# Altium PCB PCB_Nowy.PcbDoc (part 1 of 2)
Units mil, origin at the board's own origin, x right, y up, seen from the top; angles counter-clockwise.
Board outline 6000 x 4000 mil, 6 copper layers (Top Layer, Layer 1, Zasilanie, GND, Layer 2, Bottom Layer), stack 32.112 mil thick; 107 components, 109 nets, 435 pads, 101 vias.
Unrouted connection lines stored in the file: 59.
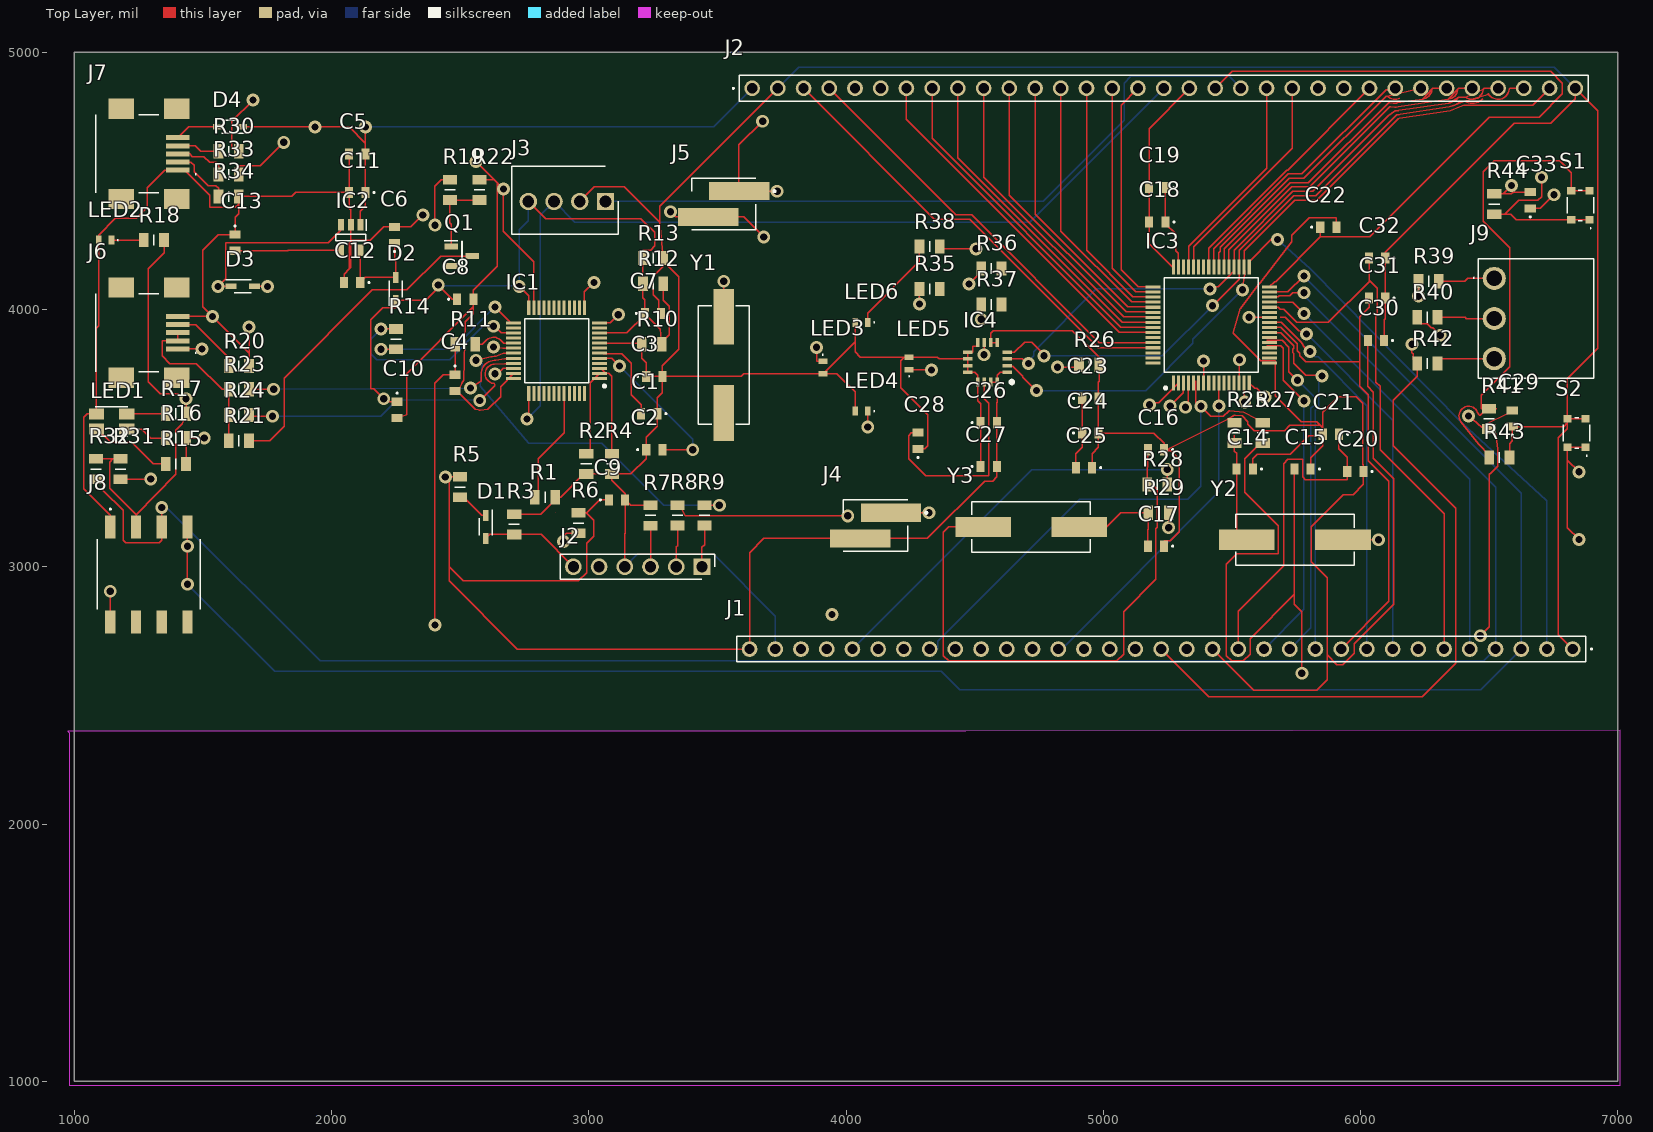
[diagram p0: Top Layer view]
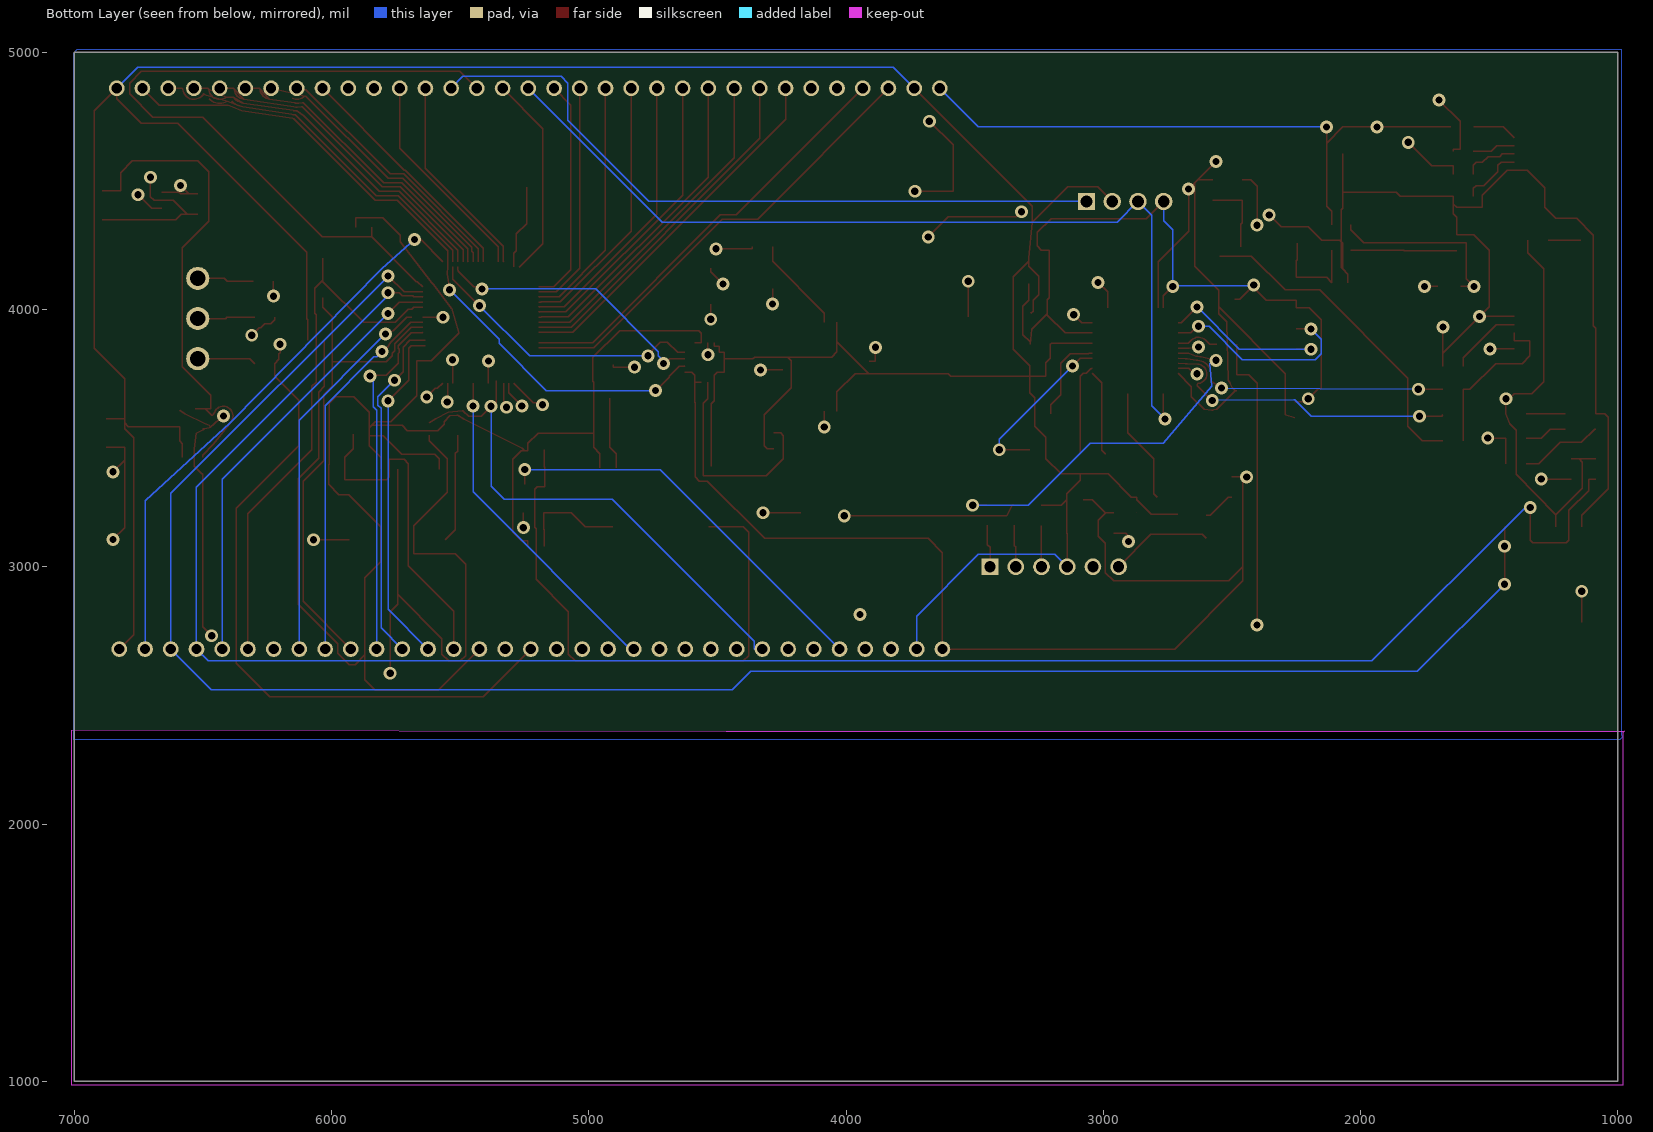
[diagram p1: Bottom Layer view, seen from below]
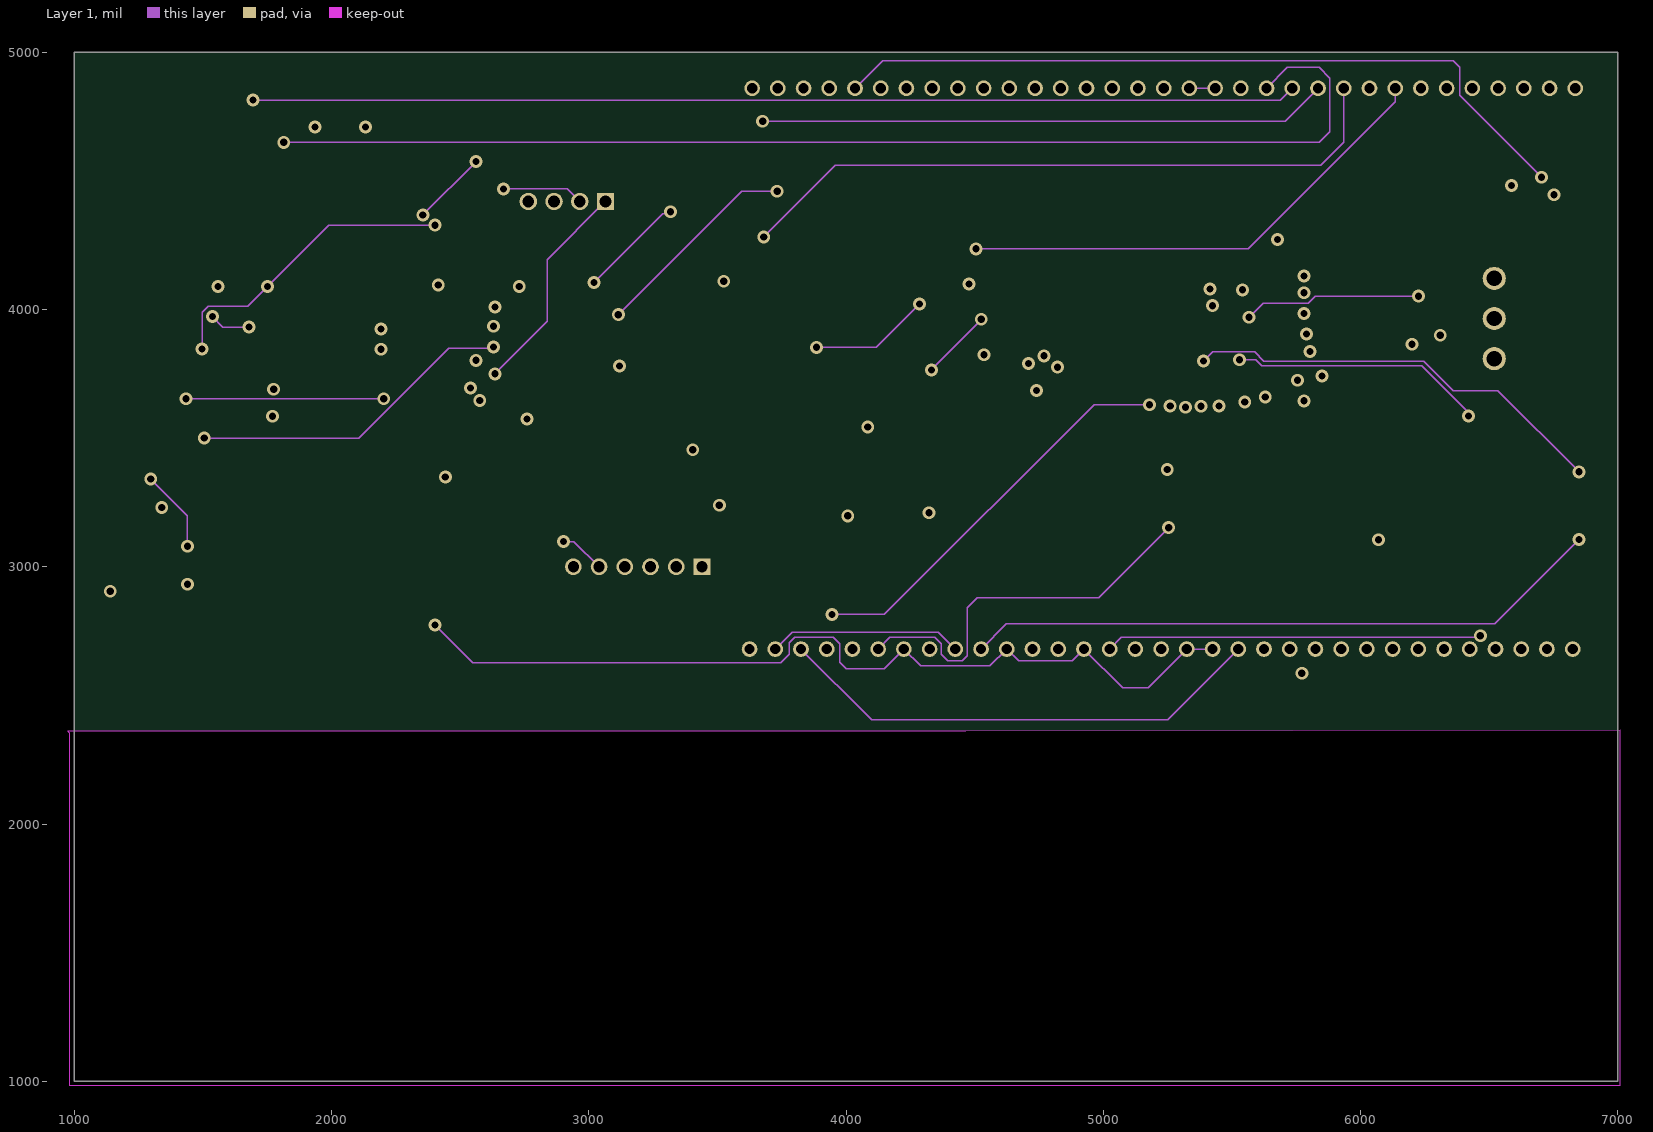
[diagram p2: Layer 1]
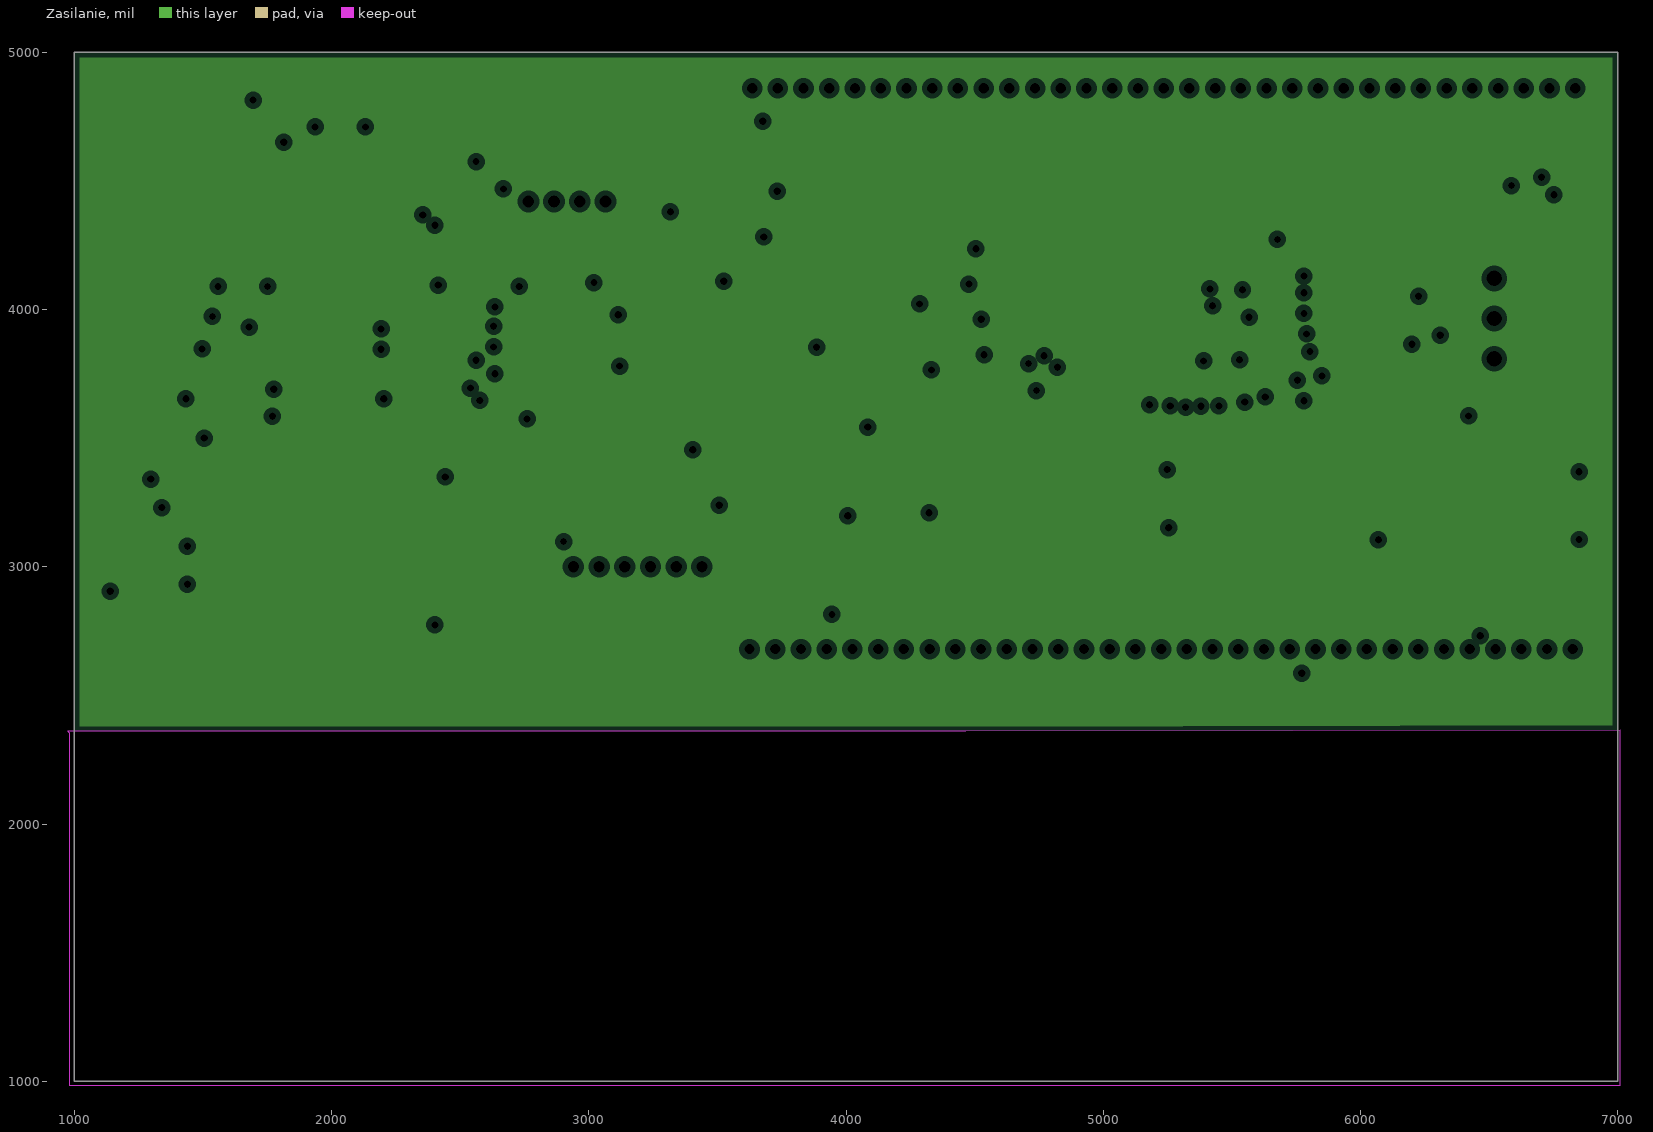
[diagram p3: Zasilanie, clearances drawn from the general rule]
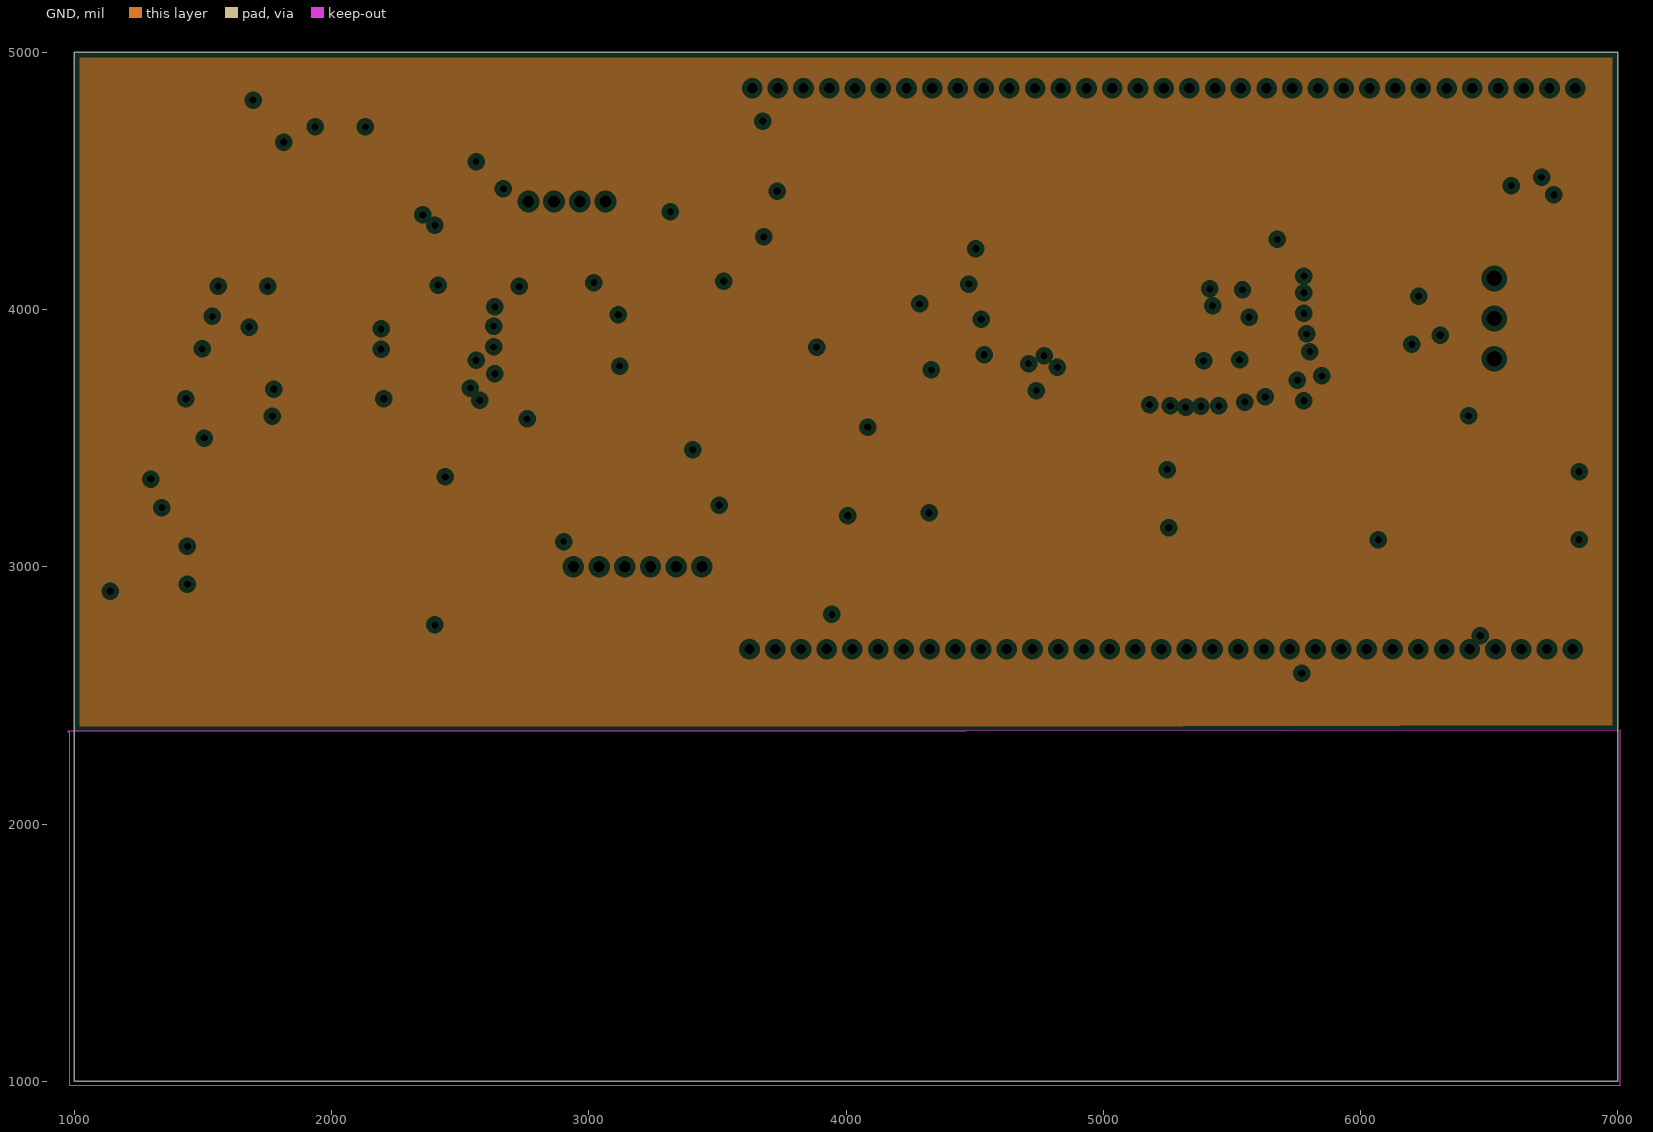
[diagram p4: GND, clearances drawn from the general rule]
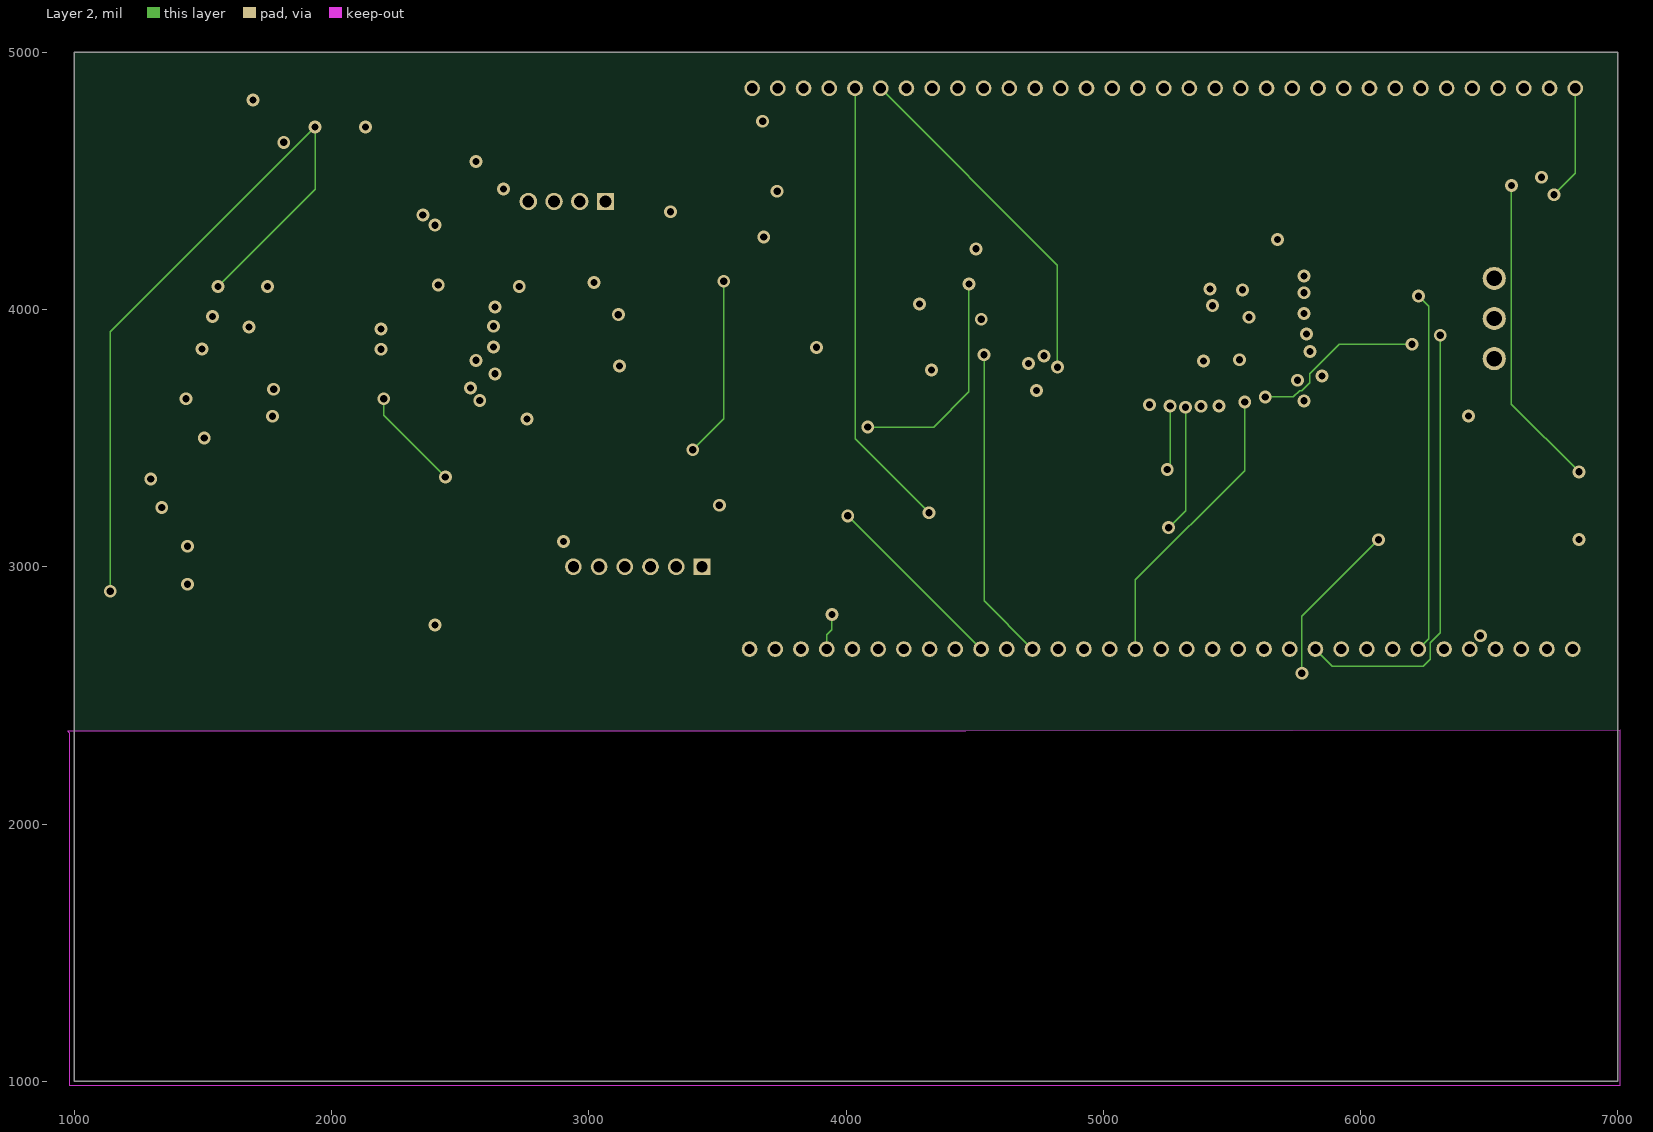
[diagram p5: Layer 2]
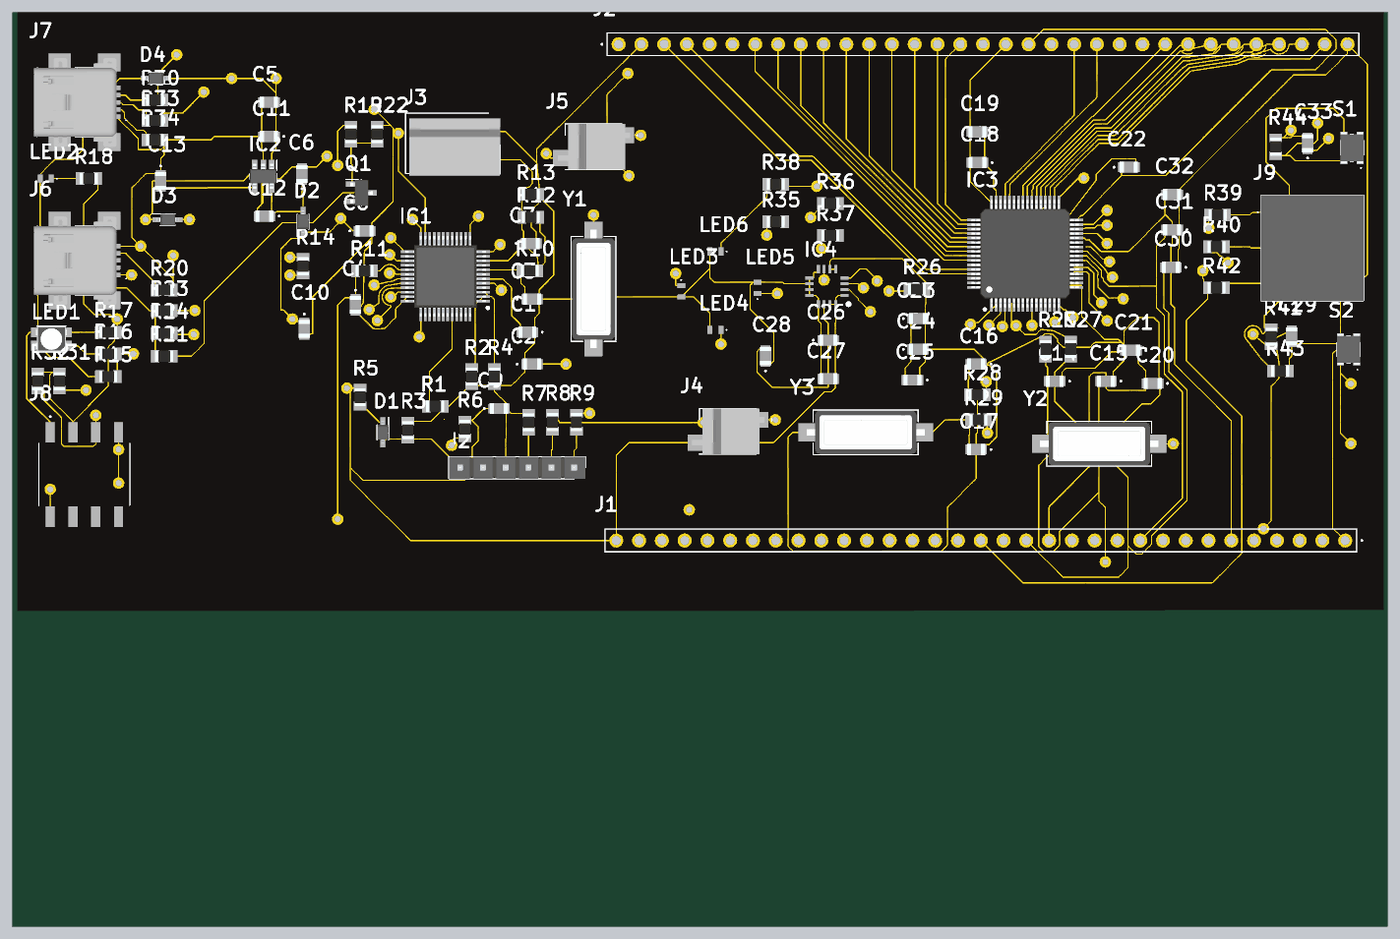
[diagram p6: 3D render of the assembled board from above, using the file's embedded part models]

## Layer stack, top to bottom
Top Solder: solder mask 0.4, Solder Resist, Dk 3.5
Top Layer: signal copper 1.4
Dielectric 4: prepreg 2.8, PP-006, Dk 4.1
Layer 1: signal copper 1.378
Dielectric 2: prepreg 2.8, PP-006, Dk 4.1
Zasilanie: plane copper 1.378
Dielectric 1: dielectric 12.6, FR-4, Dk 4.8
GND: plane copper 1.378
Dielectric 3: prepreg 2.8, PP-006, Dk 4.1
Layer 2: signal copper 1.378
Dielectric 5: prepreg 2.8, PP-006, Dk 4.1
Bottom Layer: signal copper 1.4
Bottom Solder: solder mask 0.4, Solder Resist, Dk 3.5

## Board outline
1000,1000 7000,1000 7000,5000 1000,5000
cut-out: 4465,2360 975,2360 980,2355 980,985 7010,985 7010,2365

## Design rules (kind name [scope] priority, off if disabled: settings)
Clearance [All] p1: gap=10 ignorepadtopadclearanceinfootprint=FALSE
PlaneClearance [All] p1: clearance=20
PlaneConnect [All] p1: planeconnectstyle=Relief reliefexpansion=20 reliefentries=4 reliefconductorwidth=10 reliefairgap=10
PolygonConnect [All] p1: connectstyle=Relief reliefconductorwidth=10 reliefentries=4 polygonreliefangle="90 Angle" airgapwidth=10
RoutingVias [All] p1: holewidth=28 width=50 viastyle="Through Hole" minholewidth=28 minwidth=50 maxholewidth=28 maxwidth=50
SolderMaskExpansion [All] p1: expansion=4 istentingtop=FALSE
SupplyNets "Schematic Supply Nets_6" [InNet('VDD3')] p1: voltage=0.000
SupplyNets "Schematic Supply Nets_5" [InNet('MCO')] p2: voltage=0.000
SupplyNets "Schematic Supply Nets_4" [InNet('U5V')] p3: voltage=0.000
SupplyNets "Schematic Supply Nets_3" [InNet('5V')] p4: voltage=0.000
SupplyNets "Schematic Supply Nets_2" [InNet('STM_RST')] p5: voltage=0.000
SupplyNets "Schematic Supply Nets_1" [InNet('AIN_1')] p6: voltage=0.000
SupplyNets "Schematic Supply Nets" [InNet('VDD')] p7: voltage=0.000
Width [All] p1: maxlimit=10 minlimit=10 preferedwidth=10
28 further rules are at their usual default settings.

## Classes and differential pairs
component class U_STM32Fx: C14 C15 C16 C17 C18 C19 C20 C21 C22 C23 C24 C25 IC3 R25 R26 R27 R28 R29 Y2 Y3
component class U_ST_LINK: C1 C2 C3 C4 C5 C6 C7 C8 C9 C10 C11 C12 C13 D1 D2 D3 IC1 IC2 J2 J3 J4 J5 J6 LED1 LED2 Q1 R1 R2 R3 R4 R5 R6 R7 R8 R9 R10 R11 R12 R13 R14 R15 R16 R17 R18 R19 R20 R21 R22 R23 R24 Y1
component class U_SENSOR_PB: C29 C30 C31 C32 C33 J9 R39 R40 R41 R42 R43 R44 S1 S2
component class U_MEMS_USB: C26 C27 C28 D4 IC4 J7 J8 LED3 LED4 LED5 LED6 R30 R31 R32 R33 R34 R35 R36 R37 R38
component class MB1076: J1 J2

## Components (designator, comment, footprint, x,y, rotation, side; value= is the part's Value field where it differs from the comment)
C1 "20pF" ECHU_J1_J2_17_21 3235,3595 r180 top
C2 "20pF" ECHU_J1_J2_17_21 3255,3455 r0 top
C3 "100nF" ECHU_J1_J2_17_21 3255,3740 r0 top
C4 "20pF" ECHU_J1_J2_17_21 2480,3715 r270 top
C5 "1uF" ECHU_J1_J2_17_21 2100,4605 r180 top
C6 "1uF" ECHU_J1_J2_17_21 2245,4290 r90 top
C7 "100nF" ECHU_J1_J2_17_21 3250,3985 r0 top
C8 "100nF" ECHU_J1_J2_17_21 2520,4040 r0 top
C9 "100nF" ECHU_J1_J2_17_21 3110,3260 r0 top
C10 "100nF" ECHU_J1_J2_17_21 2255,3610 r270 top
C11 "100nF" ECHU_J1_J2_17_21 2100,4455 r180 top
C12 "100nF" ECHU_J1_J2_17_21 2080,4105 r180 top
C13 "10uF" ECHU_J1_J2_17_21 1625,4260 r270 top
C14 "20pF" ECHU_J1_J2_17_21 5550,3380 r180 top
C15 "20pF" ECHU_J1_J2_17_21 5775,3380 r180 top
C16 "6.8pF" ECHU_J1_J2_17_21 5205,3455 r180 top
C17 "6.8pF" ECHU_J1_J2_17_21 5205,3080 r180 top
C18 "100nF" ECHU_J1_J2_17_21 5210,4340 r180 top
C19 "100nF" ECHU_J1_J2_17_21 5210,4475 r180 top
C20 "1uF" ECHU_J1_J2_17_21 5980,3370 r180 top
C21 "100nF" ECHU_J1_J2_17_21 5885,3515 r180 top
C22 "100nF" ECHU_J1_J2_17_21 5875,4320 r0 top
C23 "100nF" ECHU_J1_J2_17_21 4950,3655 r0 top
C24 "100nF" ECHU_J1_J2_17_21 4950,3520 r0 top
C25 "1uF" ECHU_J1_J2_17_21 4925,3385 r180 top
C26 "100nF" ECHU_J1_J2_17_21 4555,3560 r0 top
C27 "10uF" ECHU_J1_J2_17_21 4555,3390 r0 top
C28 "10nF" ECHU_J1_J2_17_21 4280,3490 r90 top
C29 "100nF" ECHU_J1_J2_17_21 6590,3576.5 r90 top
C30 "47nF" ECHU_J1_J2_17_21 6060,3880 r180 top
C31 "47nF" ECHU_J1_J2_17_21 6065,4045 r180 top
C32 "47nF" ECHU_J1_J2_17_21 6065,4200 r180 top
C33 "100nF" ECHU_J1_J2_17_21 6660,4425 r90 top
D1 "*" SOD2513X117N 2600,3155 r270 top
D2 "*" SOD2513X117N 2250,4080 r90 top
D3 "*" SOD2513X117N 1655,4090 r0 top
D4 "*" SOD2513X117N 1605,4710 r180 top
IC1 "*" QFP50P900X900X160-48N 2875,3840 r180 top
IC2 "LD3985M33R" SOT95P280X145-5N 2075,4280 r270 top
IC3 "STM32F072RBT6" QFP50P1200X1200X160-64N 5420,3940 r90 top
IC4 "L3GD20" QFN65P400X400X100-16N 4550,3795 r180 top
J1 "BCS-133-F-S-TE" BCS-133-XXX-S-TE 6825,2680 r180 top
J2 "BCS-133-F-S-TE" BCS-133-XXX-S-TE 3635,4860 r0 top (schematic designator J?)
J2 "*" HDRV6W64P0X254_1X6_1524X248X838P 3440,3000 r0 top
J3 "*" SHDR4W66P0X254_1X4_1016X635X1079P 3065,4420 r180 top
J4 "*" 36471662 4115.16,3160 r90 top
J5 "*" 36471662 3525,4410 r90 top
J6 "1-1734035-2" 117340352 1250,3910 r0 top
J7 "1-1734035-2" 117340352 1250,4605 r0 top
J8 "SSM-104-L-DH" SSM-104-XXX-DH 1290,2970 r180 top
J9 "0009481034" 0009481034 6520,4120.91 r90 top
LED1 "*" AVAGO_PLCC4 1145,3565 r90 top
LED2 "*" 19213R6CAP1Q2B3T 1120,4270 r0 top
LED3 "*" 19213R6CAP1Q2B3T 3910,3775 r90 top
LED4 "*" 19213R6CAP1Q2B3T 4060,3605 r0 top
LED5 "*" 19213R6CAP1Q2B3T 4245,3790 r270 top
LED6 "*" 19213R6CAP1Q2B3T 4060,3950 r0 top
Q1 "*" SOT95P250X135-3N 2506.34,4207.4 r0 top
R1 "100k" RESC2012X60N 2830,3270 r180 top
R2 "10k" RESC2012X60N 2990,3400 r90 top
R3 "10k" RESC2012X60N 2710,3165 r90 top
R4 "10k" RESC2012X60N 3090,3400 r90 top
R5 "22" RESC2012X60N 2500,3310 r90 top
R6 "22" RESC2012X60N 2960,3170 r90 top
R7 "22" RESC2012X60N 3240,3199.37 r90 top
R8 "22" RESC2012X60N 3345,3200 r90 top
R9 "22" RESC2012X60N 3450,3200 r90 top
R10 "100k" RESC2012X60N 3245,3865 r0 top
R11 "100" RESC2012X60N 2520,3865 r180 top
R12 "4k7" RESC2012X60N 3250,4100 r180 top
R13 "4k7" RESC2012X60N 3250,4200 r180 top
R14 "100" RESC2012X60N 2250,3885 r90 top
R15 "100" RESC2012X60N 1395,3400 r180 top
R16 "100" RESC2012X60N 1395,3500 r180 top
R17 "0" RESC2012X60N 1395,3595 r180 top
R18 "1k" RESC2012X60N 1309.37,4270 r0 top
R19 "10k" RESC2012X60N 2460,4465 r270 top
R20 "100k" RESC2012X60N 1640,3780 r0 top
R21 "1k5" RESC2012X60N 1640,3490 r180 top
R22 "36k" RESC2012X60N 2575,4465 r90 top
R23 "0" RESC2012X60N 1640,3690 r180 top
R24 "0" RESC2012X60N 1640,3590 r180 top
R25 "0" RESC2012X60N 5510,3520.63 r270 top
R26 "510" RESC2012X60N 4945,3785 r180 top
R27 "220" RESC2012X60N 5620,3520.63 r270 top
R28 "0" RESC2012X60N 5210,3320 r180 top
R29 "0" RESC2012X60N 5215,3210 r180 top
R30 "0" RESC2012X60N 1600,4615 r180 top
R31 "4k7" RESC2012X60N 1180,3380 r90 top
R32 "4k7" RESC2012X60N 1085,3380 r90 top
R33 "0" RESC2012X60N 1600,4525 r180 top
R34 "100k" RESC2012X60N 1600,4440 r180 top
R35 "1k" RESC2012X60N 4325,4080 r0 top
R36 "1k" RESC2012X60N 4565,4160 r0 top
R37 "510" RESC2012X60N 4565,4020 r0 top
R38 "330" RESC2012X60N 4325,4245 r0 top
R39 "10K" RESC2012X60N 6265,4110 r0 top
R40 "10K" RESC2012X60N 6260,3970 r0 top
R41 "10K" RESC2012X60N 6500,3575 r270 top
R42 "10K" RESC2012X60N 6260,3790 r0 top
R43 "10K" RESC2012X60N 6540,3425 r180 top
R44 "10K" RESC2012X60N 6520,4410 r270 top
S1 "TL3700AF100QG" TL3700AF100QG 6855,4405 r90 top
S2 "TL3700AF100QG" TL3700AF100QG 6840,3520 r90 top
Y1 "8MHz" FOXSDLF08020 3525,3785 r90 top
Y2 "8MHz" FOXSDLF08020 5745,3105 r0 top
Y3 "MC306-G-06Q-32.768" FOXSDLF08020 4720,3155 r0 top

## Footprints (in the part's own frame and the unit in brackets; to place one, negate y for a bottom-side part, rotate by r counter-clockwise, add the part's x,y. Pads: shape width x height; smd on the part's side, far side on the other; paste and mask are expansions set on the pad)
19213R6CAP1Q2B3T [mm]
  rect 0.55x0.9 smd: 1(0.625,0) 2(-0.625,0)
  silkscreen extent 1.2,-0.05 1.3,0.05
0009481034 [mm]
  round 2.28 hole 1.52: 1(0,0) 2(-3.96,0) 3(-7.92,0)
  silkscreen extent -9.85,-9.81 1.93,2.05, body extent -9.85,-9.81 1.93,1.59, height 12.27
36471662 [mm]
  rect 1.78x5.97 smd: 1(1.27,-1.52) 2(-1.27,1.52)
  silkscreen extent -2.54,-5.1 2.54,3.17, body extent -2.54,-4.08 2.54,4, height 10.55
117340352 [mm]
  rect 2.3x0.5 smd: 1(3.875,-1.6) 2(3.875,-0.8) 3(3.875,0) 4(3.875,0.8) 5(3.875,1.6)
  rect 2.5x2 smd: MP1(3.775,-4.45) MP2(3.775,4.45) MP3(-1.725,-4.45) MP4(-1.725,4.45)
  silkscreen extent -4.22,-3.85 5.7,3.85, body extent -4.6,-4.96 4.6,4.94, height 4.14
AVAGO_PLCC4 [mm]
  rect 1.1x1.5 smd: 1(-0.75,-1.5) 2(-0.75,1.5) 3(0.75,1.5) 4(0.75,-1.5)
  silkscreen extent -1.45,-2.67 1.45,1.6, body extent -1.4,-1.75 1.4,1.75, height 1.9
BCS-133-XXX-S-TE [mm]
  round 1.55 hole 1.02: 1(0,0) 2(2.54,0) 3(5.08,0) 4(7.62,0) 5(10.16,0) 6(12.7,0) 7(15.24,0) 8(17.78,0) 9(20.32,0) 10(22.86,0) 11(25.4,0) 12(27.94,0) 13(30.48,0) 14(33.02,0) 15(35.56,0) 16(38.1,0) 17(40.64,0) 18(43.18,0) 19(45.72,0) 20(48.26,0) 21(50.8,0) 22(53.34,0) 23(55.88,0) 24(58.42,0) 25(60.96,0) 26(63.5,0) 27(66.04,0) 28(68.58,0) 29(71.12,0) 30(73.66,0) 31(76.2,0) 32(78.74,0) 33(81.28,0)
  silkscreen extent -1.9,-1.27 82.55,1.27
ECHU_J1_J2_17_21 [mm]
  rect 0.8x1.1 smd: 1(-0.8,0) 2(0.8,0)
  silkscreen extent -1.7,-0.05 -1.6,0.05, body extent -1,-0.63 1,0.63, height 1.1
FOXSDLF08020 [mm]
  rect 5.5x2 smd: 1(-4.75,0) 2(4.75,0)
  silkscreen extent -5.85,-2.5 5.85,2.5, body extent -6.6,-2.41 6.6,2.41, height 4.5
HDRV6W64P0X254_1X6_1524X248X838P [mm]
  rect 1.65x1.65 hole 1.1: 1(0,0)
  round 1.65 hole 1.1: 2(-2.54,0) 3(-5.08,0) 4(-7.62,0) 5(-10.16,0) 6(-12.7,0)
  silkscreen extent -13.97,-1.24 1.27,1.24, body extent -13.97,-1.24 1.27,1.24, height 8.38
QFN65P400X400X100-16N [mm]
  rect 0.9x0.35 smd: 1(-1.95,0.975) 2(-1.95,0.325) 3(-1.95,-0.325) 4(-1.95,-0.975) 9(1.95,-0.975) 10(1.95,-0.325) 11(1.95,0.325) 12(1.95,0.975)
  rect 0.35x0.9 smd: 5(-0.975,-1.95) 6(-0.325,-1.95) 7(0.325,-1.95) 8(0.975,-1.95) 13(0.975,1.95) 14(0.325,1.95) 15(-0.325,1.95) 16(-0.975,1.95)
  silkscreen extent -2.56,1.79 -2.24,2.11, body extent 0,0 0,0
QFP50P900X900X160-48N [mm]
  rect 1.475x0.3 smd: 1(-4.238,2.75) 2(-4.238,2.25) 3(-4.238,1.75) 4(-4.238,1.25) 5(-4.238,0.75) 6(-4.238,0.25) 7(-4.238,-0.25) 8(-4.238,-0.75) 9(-4.238,-1.25) 10(-4.238,-1.75) 11(-4.238,-2.25) 12(-4.238,-2.75) 25(4.238,-2.75) 26(4.238,-2.25) 27(4.238,-1.75) 28(4.238,-1.25) 29(4.238,-0.75) 30(4.238,-0.25) 31(4.238,0.25) 32(4.238,0.75) 33(4.238,1.25) 34(4.238,1.75) 35(4.238,2.25) 36(4.238,2.75)
  rect 0.3x1.475 smd: 13(-2.75,-4.238) 14(-2.25,-4.238) 15(-1.75,-4.238) 16(-1.25,-4.238) 17(-0.75,-4.238) 18(-0.25,-4.238) 19(0.25,-4.238) 20(0.75,-4.238) 21(1.25,-4.238) 22(1.75,-4.238) 23(2.25,-4.238) 24(2.75,-4.238) 37(2.75,4.238) 38(2.25,4.238) 39(1.75,4.238) 40(1.25,4.238) 41(0.75,4.238) 42(0.25,4.238) 43(-0.25,4.238) 44(-0.75,4.238) 45(-1.25,4.238) 46(-1.75,4.238) 47(-2.25,4.238) 48(-2.75,4.238)
  silkscreen extent -4.85,-3.15 3.15,3.62, body extent -4.5,-4.5 4.5,4.5, height 1.6
QFP50P1200X1200X160-64N [mm]
  rect 1.475x0.3 smd: 1(-5.738,3.75) 2(-5.738,3.25) 3(-5.738,2.75) 4(-5.738,2.25) 5(-5.738,1.75) 6(-5.738,1.25) 7(-5.738,0.75) 8(-5.738,0.25) 9(-5.738,-0.25) 10(-5.738,-0.75) 11(-5.738,-1.25) 12(-5.738,-1.75) 13(-5.738,-2.25) 14(-5.738,-2.75) 15(-5.738,-3.25) 16(-5.738,-3.75) 33(5.738,-3.75) 34(5.738,-3.25) 35(5.738,-2.75) 36(5.738,-2.25) 37(5.738,-1.75) 38(5.738,-1.25) 39(5.738,-0.75) 40(5.738,-0.25) 41(5.738,0.25) 42(5.738,0.75) 43(5.738,1.25) 44(5.738,1.75) 45(5.738,2.25) 46(5.738,2.75) 47(5.738,3.25) 48(5.738,3.75)
  rect 0.3x1.475 smd: 17(-3.75,-5.738) 18(-3.25,-5.738) 19(-2.75,-5.738) 20(-2.25,-5.738) 21(-1.75,-5.738) 22(-1.25,-5.738) 23(-0.75,-5.738) 24(-0.25,-5.738) 25(0.25,-5.738) 26(0.75,-5.738) 27(1.25,-5.738) 28(1.75,-5.738) 29(2.25,-5.738) 30(2.75,-5.738) 31(3.25,-5.738) 32(3.75,-5.738) 49(3.75,5.738) 50(3.25,5.738) 51(2.75,5.738) 52(2.25,5.738) 53(1.75,5.738) 54(1.25,5.738) 55(0.75,5.738) 56(0.25,5.738) 57(-0.25,5.738) 58(-0.75,5.738) 59(-1.25,5.738) 60(-1.75,5.738) 61(-2.25,5.738) 62(-2.75,5.738) 63(-3.25,5.738) 64(-3.75,5.738)
  silkscreen extent -6.35,-4.65 4.65,4.65, body extent -6,-6 6,6, height 1.6
RESC2012X60N [mm]
  rect 0.95x1.4 smd: 1(-1,0) 2(1,0)
  silkscreen extent 0,-0.53 0,0.53, body extent -1,-0.63 1,0.63, height 0.6
SHDR4W66P0X254_1X4_1016X635X1079P [mm]
  rect 1.725x1.725 hole 1.15: 1(0,0)
  round 1.725 hole 1.15: 2(2.54,0) 3(5.08,0) 4(7.62,0)
  silkscreen extent -1.27,-3.48 9.27,3.25, body extent -1.28,-2.88 8.88,3.47, height 10.52
SOD2513X117N [mm]
  rect 1.085x0.55 smd: 1(-1.14,0) 2(1.14,0)
  silkscreen extent -1.68,-0.64 0.83,0.64, body extent -1.25,-0.64 1.25,0.64, height 1.17
SOT95P250X135-3N [mm]
  rect 1.35x0.6 smd: 1(-1.05,0.95) 2(-1.05,-0.95) 3(1.05,0)
  silkscreen extent -1.72,-1.45 0.02,1.5, body extent -1.25,-1.45 1.25,1.45, height 1.15
SOT95P280X145-5N [mm]
  rect 1.15x0.6 smd: 1(-1.25,0.95) 2(-1.25,0) 3(-1.25,-0.95) 4(1.25,-0.95) 5(1.25,0.95)
  silkscreen extent -1.82,-1.47 0.33,1.5, body extent -1.4,-1.48 1.4,1.48, height 1.45
SSM-104-XXX-DH [mm]
  rect 1.02x2.285 smd: 1(3.81,-4.697) 2(3.81,4.697) 3(1.27,-4.697) 4(1.27,4.697) 5(-1.27,-4.697) 6(-1.27,4.697) 7(-3.81,-4.697) 8(-3.81,4.697)
  silkscreen extent -5.08,-6.5 5.08,3.46
TL3700AF100QG [mm]
  rect 0.75x0.8 smd: 1(-1.425,-0.9) 2(1.425,-0.9) 3(-1.425,0.9) 4(1.425,0.9)
  silkscreen extent -2.3,-1.3 1.5,1.3, body extent -1.73,-1.3 1.73,1.3, height 0.75

## Part data
C1 C2 C3 C4 C5 C6 C7 C8 C9 C10 C11 C12 C13 C14 C15 C16 C17 C18 C19 C20 C21 C22 C23 C24 C25 C26 C27 C28 C29 C30 C31 C32 C33: library part ECH-U1H102GX5, "Capacitor", Manufacturer_Name=Panasonic, Mouser Part Number=667-ECH-U1H102GX5, Arrow Part Number=ECH-U1H102GX5, Arrow Price/Stock=https://www.arrow.com/en/products/echu1h102gx5/panasonic?region=europe, Datasheet Link=http://industrial.panasonic.com/cdbs/www-data/pdf/RDI0000/ABD0000C173.pdf, Manufacturer_Part_Number=ECH-U1H102GX5, Mouser Price/Stock=https://www.mouser.co.uk/ProductDetail/Panasonic/ECH-U1H102GX5?qs=DWeLBnRir%2FIlo4Nc0F6AmQ%3D%3D
D1 D2 D3 D4: library part BAT60JFILM, "Schottky Diode", Manufacturer_Name=STMicroelectronics, Mouser Part Number=511-BAT60JFILM, Arrow Part Number=BAT60JFILM, Arrow Price/Stock=https://www.arrow.com/en/products/bat60jfilm/stmicroelectronics?region=nac, Datasheet Link=https://www.mouser.jp/datasheet/2/389/cd00001944-1795661.pdf, Height=1.17mm, Manufacturer_Part_Number=BAT60JFILM, Mouser Price/Stock=https://www.mouser.co.uk/ProductDetail/STMicroelectronics/BAT60JFILM?qs=GnFZssByvVVVnMaukcyLZg%3D%3D
IC1: library part stm32f103c8t6, "Integrated Circuit", Arrow Part Number=STM32F103C8T6, Manufacturer_Name=STMicroelectronics, Mouser Part Number=511-STM32F103C8T6, Arrow Price/Stock=https://www.arrow.com/en/products/stm32f103c8t6/stmicroelectronics?utm_currency=USD&region=nac, Datasheet Link=http://media.digikey.com/pdf/Data%20Sheets/ST%20Microelectronics%20PDFS/STM32F103x8,B.pdf, Height=1.6mm, Manufacturer_Part_Number=stm32f103c8t6, Mouser Price/Stock=https://www.mouser.co.uk/ProductDetail/STMicroelectronics/STM32F103C8T6?qs=bhCVus9SdFtq6kqxsU5%2FDA%3D%3D
IC2: "Integrated Circuit", Manufacturer_Name=STMicroelectronics, Mouser Part Number=511-LD3985M33R, Arrow Part Number=LD3985M33R, Arrow Price/Stock=https://www.arrow.com/en/products/ld3985m33r/stmicroelectronics?region=europe, Datasheet Link=http://www.st.com/st-web-ui/static/active/en/resource/technical/document/datasheet/CD00003395.pdf, Height=1.45mm, Manufacturer_Part_Number=LD3985M33R, Mouser Price/Stock=https://www.mouser.co.uk/ProductDetail/STMicroelectronics/LD3985M33R?qs=22WmWNTp1rrPOccVv4HZ7A%3D%3D
IC3: "Integrated Circuit", Manufacturer_Name=STMicroelectronics, Mouser Part Number=511-STM32F072RBT6, Arrow Part Number=STM32F072RBT6, Arrow Price/Stock=https://www.arrow.com/en/products/stm32f072rbt6/stmicroelectronics?region=nac, Datasheet Link=http://www.st.com/st-web-ui/static/active/en/resource/technical/document/datasheet/DM00090510.pdf, Height=1.6mm, Manufacturer_Part_Number=STM32F072RBT6, Mouser Price/Stock=https://www.mouser.co.uk/ProductDetail/STMicroelectronics/STM32F072RBT6?qs=xf9JV0PLFEcuk6sTlnutaw%3D%3D
IC4: "Integrated Circuit", Manufacturer_Name=STMicroelectronics, Mouser Part Number=511-L3GD20, Datasheet Link=http://www.mouser.com/datasheet/2/389/l3gd20-954745.pdf, Height=1mm, Manufacturer_Part_Number=L3GD20, Mouser Price/Stock=https://www.mouser.co.uk/ProductDetail/STMicroelectronics/L3GD20?qs=LYO3r17CQdPwKetw3Km8nw%3D%3D
J1 J2: "Connector", Manufacturer_Name=SAMTEC, Datasheet Link=http://suddendocs.samtec.com/prints/bcs-1xx-xxx-x-xx-xxx-mkt.pdf, Manufacturer_Part_Number=BCS-133-F-S-TE
J2: library part HTSW-106-07-FM-S, "Connector", Manufacturer_Name=SAMTEC, Mouser Part Number=200-HTSW10607FMS, Arrow Part Number=HTSW-106-07-FM-S, Arrow Price/Stock=https://www.arrow.com/en/products/htsw-106-07-fm-s/samtec?region=nac, Datasheet Link=https://componentsearchengine.com/Datasheets/1/HTSW-106-07-FM-S.pdf, Height=8.38mm, Manufacturer_Part_Number=HTSW-106-07-FM-S, Mouser Price/Stock=https://www.mouser.co.uk/ProductDetail/Samtec/HTSW-106-07-FM-S?qs=Cqqh%252BS766wlnt4X%2FtppSRg%3D%3D
J3: library part 3-647050-4, "Connector", Manufacturer_Name="TE Connectivity", Mouser Part Number=571-3-647050-4, Arrow Part Number=3-647050-4, Arrow Price/Stock=https://www.arrow.com/en/products/3-647050-4/te-connectivity?region=nac, Datasheet Link=https://www.te.com/commerce/DocumentDelivery/DDEController?Action=showdoc&DocId=Customer+Drawing%7F647050%7FU%7Fpdf%7FEnglish%7FENG_CD_647050_U.pdf%7F3-647050-4, Height=10.79mm, Manufacturer_Part_Number=3-647050-4, Mouser Price/Stock=https://www.mouser.co.uk/ProductDetail/TE-Connectivity-AMP/3-647050-4?qs=W5ux9j661SoBsMK9vpa9%252BQ%3D%3D
J4 J5: library part 3-647166-2, "Connector", Manufacturer_Name="TE Connectivity", Mouser Part Number=571-3-647166-2, Arrow Part Number=3-647166-2, Arrow Price/Stock=https://www.arrow.com/en/products/3-647166-2/te-connectivity?region=nac, Datasheet Link=https://www.te.com/commerce/DocumentDelivery/DDEController?Action=showdoc&DocId=Customer+Drawing%7F647166%7FR1%7Fpdf%7FEnglish%7FENG_CD_647166_R1.pdf%7F3-647166-2, Height=10.66mm, Manufacturer_Part_Number=3-647166-2, Mouser Price/Stock=https://www.mouser.co.uk/ProductDetail/TE-Connectivity/3-647166-2?qs=xsTFCgGnzbJU1qz6Np9kzA%3D%3D
J6 J7: "Connector", Manufacturer_Name="TE Connectivity", Mouser Part Number=571-1-1734035-2, Arrow Part Number=1-1734035-2, Arrow Price/Stock=https://www.arrow.com/en/products/1-1734035-2/te-connectivity?region=nac, Datasheet Link=https://www.arrow.com/en/products/1-1734035-2/te-connectivity, Height=4.08mm, Manufacturer_Part_Number=1-1734035-2, Mouser Price/Stock=https://www.mouser.co.uk/ProductDetail/TE-Connectivity/1-1734035-2?qs=vnwGVgFuQiZQrcvyrtufjA%3D%3D
J8: "Connector", Manufacturer_Name=SAMTEC, Mouser Part Number=200-SSM104LDH, Arrow Part Number=SSM-104-L-DH, Arrow Price/Stock=https://www.arrow.com/en/products/ssm-104-l-dh/samtec?utm_currency=USD&region=nac, Datasheet Link=http://suddendocs.samtec.com/prints/ssm-1xx-xxx-xx-xx-xx-x-xx-xx-mkt.pdf, Manufacturer_Part_Number=SSM-104-L-DH, Mouser Price/Stock=https://www.mouser.co.uk/ProductDetail/Samtec/SSM-104-L-DH?qs=rU5fayqh%252BE2%252BZRQJ2nT%2FIw%3D%3D
J9: "Connector", Manufacturer_Name=Molex, Mouser Part Number=N/A, Arrow Part Number=0009481034, Arrow Price/Stock=https://www.arrow.com/en/products/0009481034/molex?region=europe, Datasheet Link=https://www.molex.com/pdm_docs/sd/009481034_sd.pdf, Height=12.17mm, Manufacturer_Part_Number=0009481034, Mouser Price/Stock=https://www.mouser.co.uk/ProductDetail/Molex/0009481034?qs=kF4zOt4%2FK7VvgYpahOC8cQ%3D%3D
LED1: library part HSMF-A201-A00J1, "LED", Manufacturer_Name="Avago Technologies", Mouser Part Number=630-HSMF-A201-A00J1, Datasheet Link=https://docs.broadcom.com/docs/AV02-0501EN, Manufacturer_Part_Number=HSMF-A201-A00J1, Mouser Price/Stock=https://www.mouser.co.uk/ProductDetail/Broadcom-Avago/HSMF-A201-A00J1?qs=YDL0qNrpDT7xUGI%252B3u9HMA%3D%3D
LED2 LED3 LED4 LED5 LED6: library part 19-213-R6C-AP1Q2B-3T, "LED", Manufacturer_Name=Everlight, Arrow Part Number=19-213-R6C-AP1Q2B-3T, Arrow Price/Stock=https://www.arrow.com/en/products/19-213-r6c-ap1q2b-3t/everlight-electronics?region=nac, Datasheet Link=https://www.arrow.com/en/products/19-213-r6c-ap1q2b-3t/everlight-electronics, Height=0.7mm, Manufacturer_Part_Number=19-213-R6C-AP1Q2B-3T
Q1: library part 15GN03CA-TB-E, "Transistor BJT NPN", Manufacturer_Name=onsemi, Mouser Part Number=863-15GN03CA-TB-E, Datasheet Link=https://www.mouser.com/datasheet/2/308/ENA1106-D-117745.pdf, Height=1.35mm, Manufacturer_Part_Number=15GN03CA-TB-E, Mouser Price/Stock=https://www.mouser.co.uk/ProductDetail/ON-Semiconductor/15GN03CA-TB-E?qs=5C9Q4QJFsuPrDQA2X5K6OA%3D%3D
R1 R2 R3 R4 R5 R6 R7 R8 R9 R10 R11 R12 R13 R14 R15 R16 R17 R18 R19 R20 R21 R22 R23 R24 R25 R26 R27 R28 R29 R30 R31 R32 R33 R34 R35 R36 R37 R38 R39 R40 R41 R42 R43 R44: library part RK73H2ATTD5111F, "Resistor", Manufacturer_Name="KOA Speer", Datasheet Link=http://www.koaspeer.com/catimages/Products/RK73H/RK73H.pdf, Height=0.6mm, Manufacturer_Part_Number=RK73H2ATTD5111F
S1 S2: "Switch", Manufacturer_Name=E-Switch, Mouser Part Number=612-TL3700AF100QG, Datasheet Link=https://componentsearchengine.com/Datasheets/2/TL3700AF100QG.pdf, Height=0.65mm, Manufacturer_Part_Number=TL3700AF100QG, Mouser Price/Stock=https://www.mouser.co.uk/ProductDetail/E-Switch/Tl3700AF100QG?qs=RgNsNAib%252BebCEEByNU3OOQ%3D%3D
Y1 Y2 Y3: library part FOXSDLF_080-20_1, "Crystal or Oscillator", Arrow Part Number=FOXSDLF/080-20, Manufacturer_Name=Fox, Mouser Part Number=559-FOXSD080-20-LF, Arrow Price/Stock=https://www.arrow.com/en/products/foxsdlf080-20/fox-electronics, Datasheet Link=http://uk.rs-online.com/web/p/products/5476452, Height=4.5mm, Manufacturer_Part_Number=FOXSDLF/080-20, Mouser Price/Stock=https://www.mouser.co.uk/ProductDetail/Fox-Abracon/FOXSDLF-080-20?qs=mzRxyRlhVdu42DWWSpKTJw%3D%3D

## Via types
v1: diameter 50, hole 28, Top Layer to Bottom Layer, 101 vias

## Nets (pads, with @x,y where several pads share a name; then routed paths per layer and width w, separated by ;. In a path a pad name is that pad's centre, name@x,y a point inside that pad or via, vN(x,y) a via of type N, cw(c..) or ccw(c..) an arc to the next point about the centre after c; other vN are vias at no path point)
5V: C5.1 C11.1 D3.1 D4.1 IC2.1 IC2.3 J2.1@3635,4860 J8.2 | length 6216.2
  Top Layer w5: J8.2 v1(1140,2905) ; D3.1 v1(1558.76,4090) 1588,4119.24 1588,4260 1987.6,4260 2037.6,4310 IC2.3 ; D4.1 v1(1936,4710) 2068,4710 2131.5,4646.5 ; IC2.1 2112.4,4382 2131.5,4401.09 C11.1 C5.1 2131.5,4646.5 ; v1(2131.5,4710) 2131.5,4646.5
  Layer 2 w5: v1(1140,2905) 1140,3914 v1(1936,4710) 1936,4467.24 v1(1558.76,4090)
  Bottom Layer w5: v1(2131.5,4710) 3485,4710 J2.1@3635,4860
AIN_1: C7.1 C8.1 C9.1 C10.1 C26.2 C27.2 D2.1 IC1.1 IC1.9 IC1.10 IC1.24 IC1.36 IC1.48 IC4.1 IC4.15 IC4.16 J1.33 J3.4 J4.2 J8.3 R5.2 R6.2 R10.2 R12.1 R12.2 R13.2 R17.1 R18.2 R31.2 R32.2 | length 10589.4
  Top Layer w5: R32.2 1150,3419.37 ; R31.2 1150,3419.37 ; J8.3 1240,3202 ; R18.2 1348.74,4220.74 1287,4159 1287,3720 1334,3673 1401.37,3673 v1@1434.37,3640 ; v1(1434,3653) 1434.37,3652.63 v1@1434.37,3640 ; C10.1 2214.5,3641.5 v1(2203,3653) 2163.5,3692.5 2152,3692.5 2152,3960 2199,4007 2250,4007 D2.1 2366,4035.12 2415,4084.12 v1(2415,4095) 2470,4040 C8.1 ; v1(2442.44,3349.37) v1@2457,3349.37 ; R5.2 v1@2457,3349.37 ; v1(2730,4090) 2766.73,4053.27 IC1.24 ; J3.4 2832,4353 3203,4353 3256,4300 3256,4247 3240,4231 3210.63,4231 R13.2 R12.2 3210.63,4045.87 3218.5,4038 C7.1 C7.1@3218,3984.5 ; R6.2 2989.63,3209.37 ; IC1.10 3148.31,3908.9 3218,3978.59 C7.1@3218,3984.5 ; C9.1 3043.63,3260 2993,3209.37 2989.63,3209.37 ; R12.1 3289.37,4035.74 3312.24,4012.87 3312.24,3901.73 3284.37,3873.86 R10.2 3278.77,3923.73 C7.1@3218,3984.5 ; IC4.15 IC4.16 ; IC4.1 4600,3756.61 4588.39,3745 IC4.16 ; 1150,3419.37 1137,3406.37 1137,3305 1240,3202 ; 1240,3202 1395,3360 1395,3531 1420,3556 R17.1 v1@1434.37,3640 ; 2457,3000 v1@2457,3349.37 ; 2457,3000 2457,2945 2722,2680 J1.33 3625,3055 3680,3110 J4.2 4316,3110 4539,3333 4570,3333 4586.5,3349.5 C27.2 C26.2 4586.5,3638 4588.39,3639.89 IC4.16 ; 2457,3000 2512,2945 2960,2945 2992,2977 2992,3091 3019,3118 3019,3180 2989.63,3209.37
  Layer 1 w5: v1(1434,3653) 1774.94,3652.5 ccw(c1775,3690) 1775.04,3652.5 v1(2203,3653)
  Layer 2 w5: v1(2203,3653) 2203,3588.81 v1(2442.44,3349.37)
  Bottom Layer w5: v1(2415,4095) 2417.5,4092.5 2727.5,4092.5 v1(2730,4090) 2730,4309.75 2765,4344.75 J3.4
B_USER: C29.2 IC3.14 J1.19 R41.2 | length 3626.3
  Top Layer w5: IC3.14 5528.27,3803.27 v1(5530,3805) ; v1(6420.4,3586.52) 6472.44,3542.56 ; v1(6466,2732) 6500,2766 6500,3361.69 6504.8,3361.69 6534.33,3391.23 6534.33,3458.77 6525.06,3519.43 6498.85,3533.49 R41.2@6494.87,3535.63 ; R41.2 R41.2@6494.87,3535.63 ; C29.2 6570.85,3594.74 6490.12,3556.48 6475.67,3549.63 6472.74,3546.7 6472.44,3542.56 ; 6472.44,3542.56 6474.94,3540.45 R41.2@6494.87,3535.63
  Layer 1 w5: J1.19 5071,2726 6460,2726 v1(6466,2732) ; v1(5530,3805) 5593.68,3805 5616.97,3781.72 6238.28,3781.72 v1@6426.94,3593.06
BOOT0: IC3.60 J2.6@4135,4860 R26.2 | length 1461.2
  Top Layer w5: v1(4822,3776) 4905.63,3776 R26.2
  Layer 2 w5: J2.6@4135,4860 4822,4173 v1(4822,3776)
EXT_RESET: J8.6
I2C2_SCL: IC3.29 J1.4 J8.5 R32.1 | length 7866.2
  Top Layer w5: R32.1 1113,3340.63 1113,3296 1190,3219 1190,3104 1200,3094 1330,3094 1340,3104 J8.5 v1(1340,3230) ; 5645.91,4048.58 5646.87,4049.55 5680.12,4049.55 5683.84,4053.27 5724.48,4053.27 5736.21,4065 v1(5780,4065)
  Bottom Layer w5: v1(1340,3230) 1360,3230 1956,2634 6479,2634 J1.4 6525,3310 5780,4055 v1(5780,4065)
I2C2_SDA: IC3.30 J1.3 J8.7 R31.1 | length 8039.8
  Top Layer w5: R31.1 v1(1297,3340.63) ; v1(1440,2932) v1(1440,3080) J8.7 ; 5645.91,4068.27 5718.27,4068.27 v1(5780,4130)
  Layer 1 w5: v1(1297,3340.63) 1440,3197.63 v1(1440,3080)
  Bottom Layer w5: v1(1440,2932) 1779,2593 4371,2593 4442,2522 6467,2522 J1.3 6625,3285 v1(5780,4130)
LD_D: IC3.38 J2.28 R37.2 | length 1388.4
  Top Layer w5: IC3.38@5469.21,4185.91 5470.49,4187.19 5470.49,4235.35 5727.22,4492.07 5797.07,4492.07 6109.48,4804.48 6113.62,4804.48 ; 6277.61,4854.16 cw(c6235,4860) 6241.43,4817.47 ; J2.28 6280.94,4860 6278.01,4857.07 6241.43,4817.47 ; 6113.62,4804.48 6126.67,4802.59 ; 6113.62,4804.48 6126.67,4802.59 ; 6126.67,4802.59 ccw(c6135,4860) 6143.82,4802.66 cw(c6135,4860) 6126.67,4802.59 ; 6126.67,4802.59 6241.43,4817.47 ; 6126.67,4802.59 6241.43,4817.47
LD_L: IC3.39 J2.27 R36.2 | length 1190.8
  Top Layer w5: IC3.39@5449.53,4185.91 5449.53,4219.78 5455.49,4225.74 5455.49,4241.56 5723.51,4509.57 5779.57,4509.57 6100.01,4830.01 6104.16,4830.01 6104.59,4829.58 ; J2.27 6104.59,4829.58 ; 6104.59,4829.58 ccw(c6135,4860) 6153.5,4821.17 cw(c6135,4860) 6104.59,4829.58
LD_R: IC3.40 J2.26 R38.2 | length 3083.5
  Top Layer w5: R38.2 4364.37,4236 v1(4505,4236) ; IC3.40@5429.84,4185.91 5429.84,4237.12 5719.8,4527.07 5772.07,4527.07 6099.92,4854.92 6129.92,4854.92 J2.26
  Layer 1 w5: v1(4505,4236) 5564,4236 6135,4807 J2.26
LD_U: IC3.37 J2.29 R35.2 | length 1312.4
  Top Layer w5: IC3.37@5488.9,4185.91 5488.9,4232.54 5733.43,4477.07 5803.29,4477.07 6113.77,4787.56 6117.91,4787.56 6132.37,4787.04 ; 6146.05,4787.83 cw(c6135,4860) 6132.37,4787.04 ; 6377.61,4854.16 cw(c6335,4860) 6341.41,4817.47 ; J2.29 6380.94,4860 6378.01,4857.07 6341.41,4817.47 ; 6132.37,4787.04 6341.41,4817.47
LED_STLINK: IC1.30 R15.1 R16.1 | length 1521.1
  Top Layer w5: R15.1 R16.1 v1(1505,3500) ; v1(2629.76,3854.87) 2664.76,3849.84 IC1.30
  Layer 1 w5: v1(1505,3500) 2106.57,3500 2456.57,3850 2624.89,3850 v1(2629.76,3854.87)
LS_P1: J9.3 R42.2 | length 228.5
  Top Layer w5: R42.2 6318.46,3809.09 J9.3
LS_P2: J9.2 R40.2 | length 222.7
  Top Layer w5: R40.2 6407,3970 6412,3965 J9.2
LS_P3: J9.1 R39.2 | length 220.1
  Top Layer w5: R39.2 6406,4110 6416.91,4120.91 J9.1
MCO: C4.1 C14.1 C15.1 C16.1 C17.1 C18.1 C19.1 C20.1 C21.2 C22.2 C23.2 C24.2 C25.1 C30.2 IC3.5 IC3.8 IC3.11 IC3.12 IC3.17 IC3.18 IC3.31 IC3.47 IC3.63 IC4.5 IC4.6 J1.15 J1.16 J1.20 J1.23 J1.27 R11.2 R25.1 R26.1 | length 12611.1
  Top Layer w5: v1(2402,2774) 2402,3714 2434.5,3746.5 C4.1 2480,3805 2480.63,3805.63 R11.2 ; IC4.5 IC4.6 4562.8,3908 4572.8,3918 4880,3918 4984.37,3813.63 R26.1 4984.37,3720.87 4981.5,3718 C23.2 C24.2 ; C25.1 4956.5,3440 4981.5,3465 C24.2 ; C17.1 5236.5,3101 5260,3101 5295,3136 5295,3418 5262,3451 5252.63,3451 ; C19.1 C18.1 5241.5,4334.09 5281.14,4294.45 5281.14,4228.86 5292.05,4217.95 IC3.47 ; J1.15 5586,2519 5830,2519 5871,2560 5871,2657 ; C14.1 5581.5,3419.09 5599.41,3437 5727,3437 5799,3509 C21.2@5853.5,3509 ; C15.1 5806.5,3423 5853.5,3470.01 C21.2@5853.5,3509 ; C22.2 5906.5,4357 5800,4357 5732,4289 5732,4263 5610.27,4104.68 5610.08,4104.43 5604.37,4098.72 5603.33,4095.66 5534.11,4005.62 5533.56,4004.91 5504.51,3911.13 5504.51,3908.31 5505.97,3906.84 5611.87,3800.94 5668,3800.94 5668,3792.36 5668,3664 5769,3563 5830.5,3563 5843.5,3550 ; C30.2 6028.5,3701.5 6050.61,3679.39 6050.61,3420.93 6130,3341.53 6130,2855 5975,2700 5975,2663 5932,2620 5908,2620 5871,2657 ; C24.2 5196.5,3520 5236.5,3480 C16.1 5236.5,3451 5252.63,3451 ; 5252.63,3451 5252.63,3452.93 5252.63,3455 5258.63,3461 5484.94,3573.17 5508.76,3588.57 5512.31,3588.57 5540.67,3586.2 5562.38,3564.49 5562.38,3553.68 5587.26,3528.8 5704.78,3528.8 5725.98,3550 5843.5,3550 ; 5843.5,3550 5853.5,3540 ; C21.2@5853.5,3509 C21.2 5853.5,3540 ; 5853.5,3540 5853.5,3600 5913.5,3660 5984.03,3660 6008,3636.03 6008,3399.28 6011.5,3395.78 C20.1 6011.5,3320 5971.5,3280 5933,3280 5808,3155 5808,3020 5871,2957 5871,2657
  Layer 1 w5: v1(2402,2774) 2549,2627 3746,2627 3779,2660 3779,2704.51 3800,2725.51 3949.49,2725.51 3975,2700 3975,2628 4000,2603 4148,2603 J1.27 4290.51,2614.49 4559.49,2614.49 J1.23 4671,2634 4879,2634 J1.20 5075,2530 5175,2530 J1.16 J1.15
MEMS_INT1: IC3.9 IC4.7 J1.22 | length 1269.9
  Top Layer w5: v1(4537,3824) v1@4537.2,3824.2 ; v1@4537.2,3824.06 v1@4537.2,3824.2 ; IC4.7 v1@4537.2,3824.2
  Layer 2 w5: v1(4537,3824) 4537,2868 J1.22
NetC6_1: C6.1 C12.1 D2.2 IC2.5 | length 408.6
  Top Layer w5: IC2.5 2112.4,4167.91 2111.5,4167 C12.1 2131.38,4124.88 D2.2 2250,4189 2245,4194 C6.1
NetC13_2: C13.2 IC2.4 | length 413.5
  Top Layer w5: C13.2 1830,4228.5 1832.28,4230.79 IC2.4
NetC14_2: C14.2 R25.2 Y2.1 | length 425.5
  Top Layer w5: 5510,3510.63 5510,3449.5 5518.5,3441 C14.2 5518.5,3144.49 Y2.1
NetC15_2: C15.2 R27.2 Y2.2 | length 3118.9
  Top Layer w5: 5620,3510.63 5620,3489 5550,3419 5550,3290.63 5681.26,3159.37 5681.26,3050.63 5520,3050.63 5479,3009.63 5479,2655 5500,2634 5545,2634 5571,2660 5571,2720 5743.5,2892.5 ; C15.2 5743.5,2892.5 ; v1(5772,2586) 5772,2825 5743.5,2853.5 5743.5,2892.5 ; Y2.2 v1(6070,3105)
  Layer 2 w5: v1(5772,2586) 5772,2807 v1(6070,3105)
NetC16_2: C16.2 R28.2 Y3.1 | length 2245.1
  Top Layer w5: Y3.1 4400,3155 4379,3134 4379,2655 4400,2634 5053,2634 5079,2660 5079,2826 5205,2952 5205,3148 5210,3153 5210,3301 5200,3311 5170.63,3311 R28.2 5170.63,3386 5173.5,3388.87 C16.2
NetC17_2: C17.2 R29.2 Y3.2 | length 422.3
  Top Layer w5: Y3.2 5013,3155 5068,3210 R29.2 5175.63,3145.13 5173.5,3143 C17.2
NetC28_2: C28.2 IC4.14 | length 844.1
  Top Layer w5: C28.2 4254.5,3521.5 4243,3510 4243,3420 4310,3353 4555,3353 4555,3635 4537.2,3652.8 IC4.14
NetD1_1: D1.1 R5.1 | length 129.3
  Top Layer w5: R5.1 2514,3270.63 2584.75,3199.88 D1.1
NetD1_2: D1.2 J2.6@2940,3000 R3.1 | length 398.5
  Top Layer w5: D1.2 2615.51,3125.63 R3.1 2814.37,3125.63 J2.6@2940,3000
NetD4_2: D4.2 J7.5 | length 175
  Top Layer w5: J7.5 1444.57,4710 D4.2
NetIC1_2: IC1.2 R2.2 | length 334.7
  Top Layer w5: R2.2 2991.95,3439.37 3005.65,3453.07 3005.65,3715.22 IC1.2
NetIC1_3: IC1.3 R4.2 | length 361.5
  Top Layer w5: IC1.3 3043.9,3771.1 3045.12,3769.88 3048.13,3769.88 3065.38,3752.64 3077.1,3752.64 3090,3739.74 R4.2
NetIC1_29: IC1.29 R11.1 | length 165.9
  Top Layer w5: R11.1 2586.36,3865 2603.63,3881.77 cw(c2629.76,3854.87) 2655.24,3882.38 2669.11,3869.53 IC1.29
NetIC1_44: IC1.44 R1.2 | length 450.3
  Top Layer w5: R1.2 2804.33,3283.7 2804.33,3420.74 2904.53,3520.94 IC1.44
NetJ2_1: J2.1@3440,3000 R9.1 | length 164.8
  Top Layer w5: J2.1@3440,3000 3440,3075 3450,3085 R9.1
NetJ2_2: J2.2@3340,3000 R8.1 | length 162.7
  Top Layer w5: J2.2@3340,3000 3340,3077 3345,3082 R8.1
NetJ2_3: J2.3@3240,3000 R7.1 | length 160
  Top Layer w5: J2.3@3240,3000 R7.1
NetJ2_5: J2.5@3040,3000 R6.1 | length 263
  Top Layer w5: v1(2902,3098) 2902,3120 2912.63,3130.63 R6.1
  Layer 1 w5: v1(2902,3098) 2942,3098 J2.5@3040,3000
NetJ6_2: J6.2 J6.3 R21.2 R23.2 R24.2 | length 663
  Top Layer w5: J6.3 J6.2 1342,3878.5 1342,3820 1372,3790 1475,3790 1575,3690 R23.2 R24.2 R21.2
NetJ6_4: J6.4 R20.1 | length 284.2
  Top Layer w5: J6.4 1472,3941.5 1600.63,3812.87 R20.1
NetJ7_2: J7.2 R34.2 | length 245.8
  Top Layer w5: J7.2 1452.5,4573.5 1466,4560 1466,4536 1520,4482 1550,4482 1560.63,4471.37 R34.2
NetJ7_3: J7.3 R33.2 | length 212.5
  Top Layer w5: J7.3 1448,4605 1459,4594 1504,4594 1526,4572 1550,4572 1560.63,4561.37 R33.2
NetJ7_4: J7.4 R30.2 | length 167
  Top Layer w5: J7.4 1470,4636.5 1491.5,4615 R30.2
NetLED1_1: LED1.1 R16.2 | length 166.3
  Top Layer w5: LED1.1 1262,3535.47 1297.47,3500 R16.2
NetLED1_2: LED1.2 R15.2 | length 325.8
  Top Layer w5: LED1.2 1090,3535.47 1141.47,3484 1223,3484 1307,3400 R15.2
NetLED1_4: LED1.4 R17.2 | length 151.8
  Top Layer w5: LED1.4 1279,3594.53 1279.47,3595 R17.2
NetLED2_1: LED2.1 R18.1 | length 125.4
  Top Layer w5: LED2.1 R18.1
NetLED3_1: LED3.1 R35.1 | length 606
  Top Layer w5: v1(3885.79,3853) 3885.79,3799.61 LED3.1 ; R35.1 4285.63,4022.37 v1(4286,4022)
  Layer 1 w5: v1(3885.79,3853) 4117,3853 v1(4286,4022)
NetLED4_1: LED4.1 R36.1 | length 1011.9
  Top Layer w5: v1(4084.61,3543) LED4.1 ; v1(4478,4099) 4525.63,4146.63 R36.1
  Layer 2 w5: v1(4084.61,3543) 4341,3543 4478,3680 v1(4478,4099)
NetLED5_1: LED5.1 R37.1 | length 422.1
  Top Layer w5: LED5.1 v1(4332,3765.39) ; R37.1 4525.63,3962.37 v1(4526,3962)
  Layer 1 w5: v1(4332,3765.39) 4526,3959.39 v1(4526,3962)
NetLED6_1: LED6.1 R38.1 | length 378.3
  Top Layer w5: LED6.1 4084.61,3986.42 4285.63,4187.44 R38.1
NetQ1_1: Q1.1 R19.2 R22.1 | length 297.9
  Top Layer w5: Q1.1 2465,4332 2460,4337 R19.2 R22.1
NetQ1_3: Q1.3 R21.1 | length 1275
  Top Layer w5: R21.1 1760,3490 1816,3546 1816,3733 2159,4076 2293,4076 2424.4,4207.4 Q1.3
NetR41_1: R41.1 R43.2 S1.2 S1.4 | length 1950.7
  Top Layer w5: R43.2 6500.63,3433.86 6458.91,3475.58 6390.75,3563.55 cw(c6420.4,3586.52) 6454.71,3601.64 6458.9,3592.13 6461.83,3589.2 6465.98,3589.2 R41.1@6491.14,3614.37 ; 6530,3614.37 R41.1 R41.1@6491.14,3614.37 ; S1.2 S1.4 6819.57,4532.43 6774,4578 6520,4578 6477,4535 6477,4343 6580,4240 6580,3777.56 6470,3667.56 6470,3614.37 R41.1@6491.14,3614.37
NRST: C33.2 IC1.18 IC3.7 J1.24 R8.2 R44.1 S2.1 S2.3 | length 7597.4
  Top Layer w5: R8.2 3354,3239.37 3376,3198 v1(4007,3198) ; v1(5390,3800) 5390.47,3799.53 IC3.7 ; R44.1 6554.37,4449.37 ; v1(6587,4482) 6554.37,4449.37 ; C33.2 6593.13,4456.5 6586,4449.37 6554.37,4449.37 ; v1(6850,3106) 6804.57,3151.43 6804.57,3414.43 ; v1(6850,3369) 6804.57,3414.43 ; S2.1 S2.3 6804.57,3414.43
  Layer 1 w5: J1.24 4623,2778 6522,2778 v1(6850,3106) ; v1(5390,3800) 5425,3835 5588.43,3835 5624.22,3799.22 6245.53,3799.22 6359.75,3685 6534,3685 v1(6850,3369)
  Layer 2 w5: v1(4007,3198) J1.24 ; v1(6587,4482) 6587,3632 v1(6850,3369)
OSC_IN: C2.2 IC1.5 Y1.2 | length 1494
  Top Layer w5: IC1.5 3089.53,3810.47 v1(3120,3780) ; C2.2 v1(3404,3455) ; Y1.2 v1(3525,4110)
  Layer 2 w5: v1(3404,3455) 3525,3576 v1(3525,4110)
  Bottom Layer w5: v1(3120,3780) 3404,3496 v1(3404,3455)
OSC_OUT: C1.2 IC1.6 | length 351.7
  Top Layer w5: IC1.6 3042.76,3829.25 3055.75,3829.25 3056.06,3828.94 3127.63,3828.94 3165.57,3791 3165.57,3668.73 3203.5,3630.8 C1.2
PA1: IC3.15 J1.18 | length 1211
  Top Layer w5: IC3.15 5547.95,3642.05 v1(5550,3640)
  Layer 2 w5: J1.18 5125,2948.99 5550,3373.99 v1(5550,3640)
PA2: IC3.16 J1.17 R42.1 | length 3426.4
  Top Layer w5: J1.17 5411,2494 6241,2494 6371,2624 6371,3227 6127,3471 6127,3647.37 6220.63,3741 R42.1 6204.43,3806.2 6204.43,3827.42 6200,3831.85 v1(6200,3865) ; IC3.16 5568.54,3714.09 5589.06,3693.58 5596.42,3693.58 v1(5630,3660)
  Layer 2 w5: v1(5630,3660) 5738.43,3660 5763.43,3685 5771.57,3685 5802.5,3715.93 5802.5,3750.78 5916.72,3865 v1(6200,3865)
PA4: IC3.20 J1.13 | length 1336.5
  Top Layer w5: 5635,3860 5690,3860 5700,3850 5700,3725 v1(5780,3645)
  Bottom Layer w5: J1.13 5780,2835 v1(5780,3645)
PA5: IC3.21 J1.12 | length 1351.8
  Top Layer w5: 5635,3879.68 5695.06,3879.68 5721.21,3853.54 5721.21,3758.79 v1(5755,3725)
  Bottom Layer w5: J1.12 5807.5,2762.5 5807.5,3615.93 5820,3628.43 5820,3661.57 5756.57,3725 v1(5755,3725)
PA6: IC3.22 J1.11 R40.1 | length 3273.2
  Top Layer w5: 5645.91,3910.79 5647.13,3909.57 5690.43,3909.57 5740,3860 5740,3848.61 5737.5,3846.11 5737.5,3831.61 5740,3829.11 5740,3793.03 5741.46,3791.57 5788.03,3745 5850,3745 v1@5850,3738.43 ; R40.1 6220.63,3961.14 6236.83,3944.94 6260.49,3944.94 6275.61,3929.82 6280.18,3929.82 v1(6310,3900)
  Layer 2 w5: J1.11 5891,2614 6245,2614 6271,2640 6271,2704.79 6310,2743.79 v1(6310,3900)
  Bottom Layer w5: J1.11 5825,3608.68 5837.5,3621.18 5837.5,3725.93 v1@5850,3738.43
  other v1: 5850,3741.72
PA7: C31.2 IC3.23 J1.10 | length 1932.3
  Top Layer w5: 5645.91,3930.47 5645.97,3930.41 5690.81,3930.41 5716.47,3904.74 5755,3866.21 5755,3838.9 ; 5755,3838.86 5763.32,3830.54 5763.32,3820.2 5787.27,3796.25 5803.79,3796.25 5997,3797.74 ; J1.10 6110,2865 6110,3333.25 6030.61,3412.64 6030.61,3668.39 5997,3702 5997,3797.74 ; C31.2 6033.5,4009 5997,3972.5 5997,3797.74
PA8: IC3.41 J2.25 | length 935
  Top Layer w5: IC3.41@5410.16,4185.91 5410.16,4238.65 5713.58,4542.07 5717.07,4542.07 J2.25
PA9: IC1.13 IC3.42 J2.24 J5.2 | length 3544.9
  Top Layer w5: IC1.13 2983.27,4068.27 v1(3020,4105) ; v1(3317.64,4380) 3337.64,4360 J5.2 3603,4360 v1(3680.5,4282.5)
  Layer 1 w5: v1(3020,4105) 3287.35,4372.35 3309.98,4372.35 v1(3317.64,4380) ; v1(3680.5,4282.5) 3959,4561 5846,4561 5935,4650 J2.24
PA10: IC1.12 IC3.43 J2.23 J5.1 | length 3573
  Top Layer w5: IC1.12 3083.27,3948.27 v1(3115,3980) ; v1(3676,4732) 3584,4640 3584,4460 J5.1 v1(3732.36,4460)
  Layer 1 w5: v1(3115,3980) 3595,4460 v1(3732.36,4460) ; v1(3676,4732) 5707,4732 J2.23
PA11: IC3.44 J2.22 R30.1 | length 5151.5
  Top Layer w5: R30.1 1639.37,4624 1613,4624 1613,4732 v1(1695,4814) ; IC3.44@5351.1,4185.91 5351.1,4201.1 5352.32,4202.32 5352.32,4244.46 5735,4627.13 J2.22
  Layer 1 w5: v1(1695,4814) 5689,4814 J2.22
PA12: IC3.45 J2.21 R33.1 | length 5635.1
  Top Layer w5: R33.1 1639.37,4558 1722,4558 v1(1814,4650) ; IC3.45@5331.42,4185.91 5332.7,4187.18 5332.7,4246.04 5635,4548.35 J2.21
  Layer 1 w5: v1(1814,4650) 5840,4650 5881,4691 5881,4900 5840,4941 5716,4941 J2.21
PA13: IC1.34 IC3.46 J2.20 J3.1 | length 3705.3
  Top Layer w5: v1(2635,3750) 2645.82,3750 2666.93,3771.1 IC1.34
  Layer 1 w5: v1(2635,3750) 2839.35,3954.35 2839.35,4194.35 J3.1
  Bottom Layer w5: J3.1 4766,4420 5081,4735 5081,4880 5107,4906 5489,4906 J2.20
PA14: IC1.37 IC3.49 J2.17 J3.3 | length 3608
  Top Layer w5: v1(2760,3575) 2766.73,3581.73 IC1.37
  Bottom Layer w5: v1(2760,3575) 2810.79,3625.79 2810.79,4365.79 J3.3 2945,4340 4715,4340 J2.17
PA15: IC3.50 J2.16 | length 883.8
  Top Layer w5: J2.16 5070,4795 5070,4155 5137.05,4087.95 5194.09,4087.95
PB0: IC3.26 J1.7 R39.1 | length 2235.2
  Top Layer w5: v1(5566.87,3970) 5567.34,3969.53 IC3.26 ; R39.1 v1(6225.63,4052.44) v1(6225.63,4052.44) v1(6226,4052)
  Layer 1 w5: v1(5566.87,3970) 5621.87,4025 5796.57,4025 5823.57,4052 v1(6226,4052)
  Layer 2 w5: J1.7 6265,2720 6265,4013 v1(6226,4052)
PB1: C32.2 IC3.27 J1.6 | length 2127.7
  Top Layer w5: 5645.91,4009.21 5647.18,4007.93 5680.12,4007.93 5687.44,4000.61 5701.64,4000.61 5752.25,3950 5875,3950 6033.5,4108.5 6033.5,4113.5 ; C32.2 6033.5,4113.5 ; J1.6 6325,3205.13 6076,3454.13 6076,3701.61 6060,3717.61 6060,3980 6065,3985 6065,4082 6033.5,4113.5
PB2: IC3.28 J1.5 | length 1724.4
  Top Layer w5: 5645.91,4028.9 5736.1,4028.9 v1(5780,3985)
  Bottom Layer w5: v1(5780,3985) 6425,3340 J1.5
PB3: IC3.55 J2.11 | length 1162.8
  Top Layer w5: J2.11 4635,4445 5089.25,3990.75 5192.87,3990.75 5194.09,3989.53
PB4: IC3.56 J2.10 | length 1229.9
  Top Layer w5: J2.10 4535,4515 5078.94,3971.06 5183.94,3971.06 5185.16,3969.84 5194.09,3969.84
PB5: IC3.57 J2.9 | length 1294.1
  Top Layer w5: J2.9 4435,4590 5073.62,3951.38 5192.87,3951.38 5194.09,3950.16
PB6: IC3.58 J2.8 | length 1358.3
  Top Layer w5: J2.8 4335,4665 5068.31,3931.69 5192.87,3931.69 5194.09,3930.47
PB7: IC3.59 J2.7 | length 1422.6
  Top Layer w5: J2.7 4235,4740 5062.93,3912.07 5192.82,3912.07 5194.09,3910.79
PB8: IC3.61 J2.4@3935,4860 | length 1668.6
  Top Layer w5: J2.4@3935,4860 4426.52,4368.48 4488.11,4368.48 4985.17,3871.42 5194.09,3871.42
PB9: IC3.62 J2.3@3835,4860 | length 1776.7
  Top Layer w5: J2.3@3835,4860 4344.02,4350.98 4480.86,4350.98 4980.11,3851.73 5194.09,3851.73
PB12: IC3.33 J1.2 | length 2181.9
  Top Layer w5: IC3.33@5567.64,4185.91 5654.08,4272.35 v1(5677.35,4272.35)
  Bottom Layer w5: v1(5677.35,4272.35) 5805.03,4157.93 cw(c5780,4130) 5806.72,4156.31 6393.68,3560.2 ccw(c6420.4,3586.52) 6395.08,3558.86 6722.07,3259.5 6725,3256.57 J1.2
PB13: IC3.34 IC4.2 J2.32 | length 2713.7
  Top Layer w5: IC4.2 4628.66,3780.31 4648.89,3780.31 4687.91,3741.29 4687.91,3737.09 v1(4740,3685) ; v1(5541.39,4076.62) 5549.93,4139.37 IC3.34 5548.83,4193.44 5548.83,4228.83 5744.57,4424.57 5829.57,4424.57 6146.44,4741.44 6151.08,4743.08 6348.2,4772.98 6386.82,4788.86 6401.75,4795 6468.25,4795 6670,4795 J2.32
  Bottom Layer w5: v1(4740,3685) 5165,3685 5348.89,3868.89 5348.89,3884.12 v1(5541.39,4076.62)
PB14: IC3.35 IC4.4 J2.31 | length 2907.5
  Top Layer w5: IC4.4 4654.61,3833.39 4694.22,3873 4722,3873 4770,3825 v1(4770,3820) ; v1(5425,4015) 5528.27,4118.27 IC3.35 ; IC3.35@5528.27,4185.91 5528.27,4193.27 5529.49,4194.49 5529.49,4230.7 5740.86,4442.07 5825.86,4442.07 6140.95,4757.16 ; J2.31 6580.94,4860 6579.55,4858.84 ; 6140.95,4757.16 ccw(c6135,4860) 6150.48,4758.16 cw(c6135,4860) 6140.95,4757.16 ; 6140.95,4757.16 6345.95,4787.81 ; 6345.95,4787.81 ccw(c6335,4860) 6373.89,4798.21 ; 6345.95,4787.81 ccw(c6335,4860) 6373.89,4798.21 ; 6345.95,4787.81 6373.89,4798.21 ; 6373.89,4798.21 ccw(c6335,4860) 6388.2,4810 cw(c6335,4860) 6373.89,4798.21 ; 6373.89,4798.21 6405.58,4810 ; 6405.58,4810 ccw(c6435,4860) 6476.23,4819.19 cw(c6435,4860) 6405.58,4810 ; 6405.58,4810 6492.42,4835.55 ; 6492.42,4835.55 cw(c6495.97,4832.03) 6493.59,4836.43 ; 6492.42,4835.55 cw(c6495.97,4832.03) 6493.59,4836.43 ; 6492.42,4835.55 6493.59,4836.43 ; 6493.59,4836.43 6497.67,4838.64 ; 6497.67,4838.64 ccw(c6535,4860) 6577.78,4855.56 ; 6497.67,4838.64 ccw(c6535,4860) 6577.78,4855.56 ; 6577.78,4855.56 cw(c6582.75,4855) 6577.81,4855.77 6578.01,4857.07 6578.83,4858.11 ; 6578.83,4858.11 cw(c6582.75,4855) 6579.55,4858.84 ; 6578.83,4858.11 cw(c6582.75,4855) 6579.55,4858.84 ; 6578.83,4858.11 6579.55,4858.84
  Bottom Layer w5: v1(4770,3820) 5230,3820 v1(5425,4015)
PB15: IC3.36 IC4.3 J2.30 | length 2693.3
  Top Layer w5: IC4.3 4686.08,3807.8 4703.87,3790 v1(4710,3790) ; v1(5415,4080) 5422.65,4087.65 5447.11,4087.65 5507.36,4147.9 5507.36,4152.36 5508.58,4153.58 IC3.36 ; IC3.36@5508.58,4185.91 5508.58,4231.01 5737.15,4459.57 5814.57,4459.57 6108.26,4753.26 6134.56,4771.99 ; 6148.26,4772.99 cw(c6135,4860) 6134.56,4771.99 ; J2.30 6480.94,4860 6478.01,4857.07 6410,4825 ; 6134.56,4771.99 6343.7,4802.64 ; 6343.71,4802.65 ccw(c6335,4860) 6377.42,4820.43 cw(c6335,4860) 6343.71,4802.65 ; 6343.7,4802.64 6381.99,4825 ; 6343.71,4802.65 6381.99,4825 ; 6381.99,4825 6410,4825 ; 6410,4825 ccw(c6435,4860) 6477.61,4854.16 cw(c6435,4860) 6410,4825
  Bottom Layer w5: v1(4710,3790) 4710,3800.82 4730,3820.82 4730,3836.57 4973.43,4080 v1(5415,4080)
PC2: IC3.10 J1.21 | length 1301.1
  Top Layer w5: IC3.10 5449.53,3625.47 v1(5450,3625)
  Bottom Layer w5: J1.21 4838.57,2680 5450,3291.43 v1(5450,3625)
PC4: IC3.24 J1.9 | length 1464.6
  Top Layer w5: 5645.91,3950.16 5692.27,3950.16 5770,3872.43 5792.5,3836.76 v1(5803.32,3836.76)
  Bottom Layer w5: v1(5803.32,3836.76) 5823.99,3816.1 5835.47,3816.1 6025,3626.57 J1.9
PC5: IC3.25 J1.8 | length 1490.7
  Top Layer w5: 5687.44,3969.84 5707.66,3969.84 5759.6,3917.9 v1(5790.23,3905.23)
  Bottom Layer w5: v1(5790.23,3905.23) 6125,3570.46 J1.8
PC10: IC3.51 J2.15 | length 897.1
  Top Layer w5: J2.15 5035,4160 5125.51,4069.49 5192.87,4069.49 5194.09,4068.27
PC11: IC3.52 J2.14 | length 964.2
  Top Layer w5: J2.14 4935,4230 5115.2,4049.8 5192.87,4049.8 5194.09,4048.58
PC12: IC3.53 J2.13 | length 1028.5
  Top Layer w5: J2.13 4835,4305 5109.88,4030.12 5184.88,4030.12 5186.1,4028.9 5194.09,4028.9
PC13: IC3.2 J1.30 | length 1862.7
  Top Layer w5: v1(5180,3630) 5187.65,3637.65 5215.61,3637.65 IC3.2
  Layer 1 w5: v1(3945,2815) 4149.59,2815 4964.59,3630 v1(5180,3630)
  Layer 2 w5: J1.30 3925,2735.16 3945,2755.16 v1(3945,2815)
PC14: IC3.3 J1.29 R28.1 | length 1933.4
  Top Layer w5: v1(5249,3378) 5249.37,3377.63 R28.1 ; v1(5260.25,3625.43) 5311.73,3676.92 IC3.3
  Layer 2 w5: v1(5249,3378) 5260.25,3389.25 v1(5260.25,3625.43)
  Bottom Layer w5: J1.29 4723,3378 v1(5249,3378)
PC15: IC3.4 J1.28 R29.1 | length 2184
  Top Layer w5: v1(5254,3152) v1(5254.37,3152.44) v1(5254.37,3152.44) R29.1 ; v1(5320,3620) 5320,3630.82 5331.42,3642.24 IC3.4
  Layer 1 w5: J1.28 4170.51,2725.51 4345,2725.51 4370.51,2700 4370.51,2660 4396.02,2634.49 4451.49,2634.49 4471,2654 4471,2840 4511,2880 4982,2880 v1(5254,3152)
  Layer 2 w5: v1(5254.37,3152.44) 5320,3218.07 v1(5320,3620)
PD2: IC3.54 J2.12 | length 1098.5
  Top Layer w5: J2.12 4735,4370 5094.57,4010.43 5192.87,4010.43 5194.09,4009.21
PF1: IC3.6 J1.26 R27.1 | length 2037.3
  Top Layer w5: 5359.88,3722.68 5359.88,3630.12 5366,3624 v1(5379.87,3624) 5418.87,3585 5466.57,3585 5486.97,3605.41 5488.44,3606.87 5492.58,3606.87 5546.88,3601.2 5594.94,3576.2 R27.1
  Bottom Layer w5: J1.26 4357,2680 4357,2710 4909,3262 5329,3262 5379.87,3312.87 v1(5379.87,3624)
STM_RST: C1.1 C2.1 C3.1 C3.2 C4.2 C5.2 C6.2 C7.2 C8.2 C9.2 C10.2 C11.2 C12.2 C13.1 C26.1 C27.1 C28.1 C29.1 C30.1 C31.1 C32.1 C33.1 IC1.7 IC1.8 IC1.20 IC1.23 IC1.35 IC1.47 IC2.2 IC4.8 IC4.9 IC4.10 IC4.11 IC4.12 IC4.13 J1.1 J1.25 J1.32 J2.2@3735,4860 J2.4@3140,3000 J2.33 J3.2 J6.5 J7.1 J8.1 LED1.3 LED2.2 LED3.2 LED4.2 LED5.2 LED6.2 R1.1 R2.1 R3.2 R4.1 R7.2 R10.1 R13.1 R20.2 R22.2 R34.1 R43.1 S2.2 S2.4 | length 23507.5
  Top Layer w5: J8.1 1140,3200 1037,3303 1037,3581.53 1050,3594.53 LED1.3 1085.94,3927 1095.39,3936.45 LED2.2 1095.39,4289.39 1160,4354 1240,4354 1283,4397 1283,4474 1351.01,4542.01 J7.1 1429,4542.01 1526,4445.01 1526,4397 1626.37,4397 1639.37,4410 ; J6.5 v1(1537,3972.99) ; R20.2 1679.37,3830.62 ; v1(1679.37,3931.99) 1679.37,3830.62 ; C12.2 2048.5,4137.5 2069,4158 ; C5.2 C11.2 ; C10.2 2292,3590 2292,3750.5 2551.5,4010 ; v1(2355,4368) 2308.5,4321.5 C6.2 2202.5,4321.5 2150,4269 2080,4269 2075,4264 ; C4.2 2485.84,3684.1 2499.15,3696.75 2506.53,3711.54 cw(c2540.09,3694.8) 2507.16,3712.75 2514.15,3725.57 2519,3951.5 2520.46,3952.97 2551.5,3984 2551.5,4010 ; C4.2@2485.91,3683.5 2557.95,3611.46 2570.58,3609.58 ccw(c2576.1,3646.67) 2578.91,3609.28 2608.03,3611.46 2656.91,3660.34 2656.91,3700.17 IC1.35 ; v1(2562,4575) 2632.63,4504.37 ; R22.2 2632.63,4504.37 ; R3.2 2812.6,3204.37 2869.37,3261.14 R1.1 2890.37,3270 2981,3360.63 R2.1 R4.1 ; IC1.23 2786.42,4185.32 2668,4303.74 v1(2668,4469) 2645,4492 ; 2869,3212 2869.37,3212.37 ; J3.2 3022,4477 3137.37,4477 3276,4338.37 ; IC1.8 3201.1,3869.53 R10.1 3205.63,3810.87 3223.5,3793 C3.1 C3.2 ; J2.4@3140,3000 3140,3129 3141.5,3130.5 C9.2 ; R7.2 3162.76,3238.74 C9.2 ; C7.2 3272.87,3993.63 3272.87,4035.63 3251,4057.5 3251,4130 3289.37,4168.37 R13.1@3289.37,4187.63 ; J2.2@3735,4860 3276,4401 3276,4338.37 ; LED4.2 4035.39,3680 3965,3750.39 LED3.2@3910.79,3750.39 ; LED6.2 4035.39,3875 ; C28.1 4305.5,3458.5 4317,3470 4317,3591 4212,3696 4212,3800 4226.61,3814.61 ; IC4.8 4511.61,3858 4492,3858 4492,3833.39 IC4.9 IC4.10 ; C27.1 C26.1 4523.5,3633 4511.61,3644.89 IC4.13 4511.61,3745 4500,3756.61 IC4.12 IC4.11 IC4.10 ; C30.1 6091.5,3960 6096.5,3965 C31.1 C32.1 6096.5,4223 6598.5,4725 6739.82,4725 6835,4820.18 J2.33 6922,4773 6922,3849 6804.57,3731.57 S2.4 ; R43.1 6579.37,3479 6590,3489.63 C29.1 6790,3545 6804.57,3559.57 ; C33.1 6699.5,4393.5 v1(6752,4446) ; J1.1 6769,2736 6769,3501.43 6804.57,3537 6804.57,3559.57 ; S2.2 S2.4 ; v1(1537,3972.99) 1679.37,3830.62 ; v1(1537,3972.99) 1498.76,4011.23 1498.76,4230.25 1560,4291.5 C13.1 1625,4358 1639.37,4372.37 1639.37,4410 ; 1639.37,4410 R34.1 1846,4440 1861,4455 C11.2 ; C11.2 2068.5,4394.5 2075,4388 IC2.2 2075,4264 ; 2069,4158 2075,4164 2075,4264 ; 2069,4158 2069,4258 2075,4264 ; 2551.5,4010 C8.2 2551.5,4074.5 2645,4168 2645,4492 ; 2632.63,4504.37 2645,4492 ; R4.1 3164.13,3360.63 3223.5,3420 C2.1 3223.5,3503 3266.5,3545.99 C1.1 3266.5,3657 3286.5,3677 C3.2 ; R4.1 3090,3335.5 3141.5,3284 C9.2 ; 3276,4338.37 R13.1 R13.1@3289.37,4187.63 ; C3.2 3286.5,3781.5 3350,3845 3350,4127 R13.1@3289.37,4187.63 ; C3.2 3593,3740 3603.39,3750.39 LED3.2 LED3.2@3910.79,3750.39 ; LED3.2@3910.79,3750.39 4035.39,3875 ; 4035.39,3875 4035.39,3835.21 4056,3814.61 4226.61,3814.61 ; 4226.61,3814.61 LED5.2 4355,3814.61 4361.81,3807.8 IC4.10 ; 6804.57,3559.57 S2.4
  Layer 1 w5: v1(1537,3972.99) 1578,3931.99 v1(1679.37,3931.99) ; v1(2355,4368) v1(2562,4575) ; v1(2668,4469) 2916,4469 J3.2 ; J1.32 3790.51,2745.51 4359.49,2745.51 J1.25
  Layer 2 w5: v1(6752,4446) 6835,4529 J2.33